# EAGLE board PRESELECTOR REV A (EAGLE 7.7.0), part 1 of 2
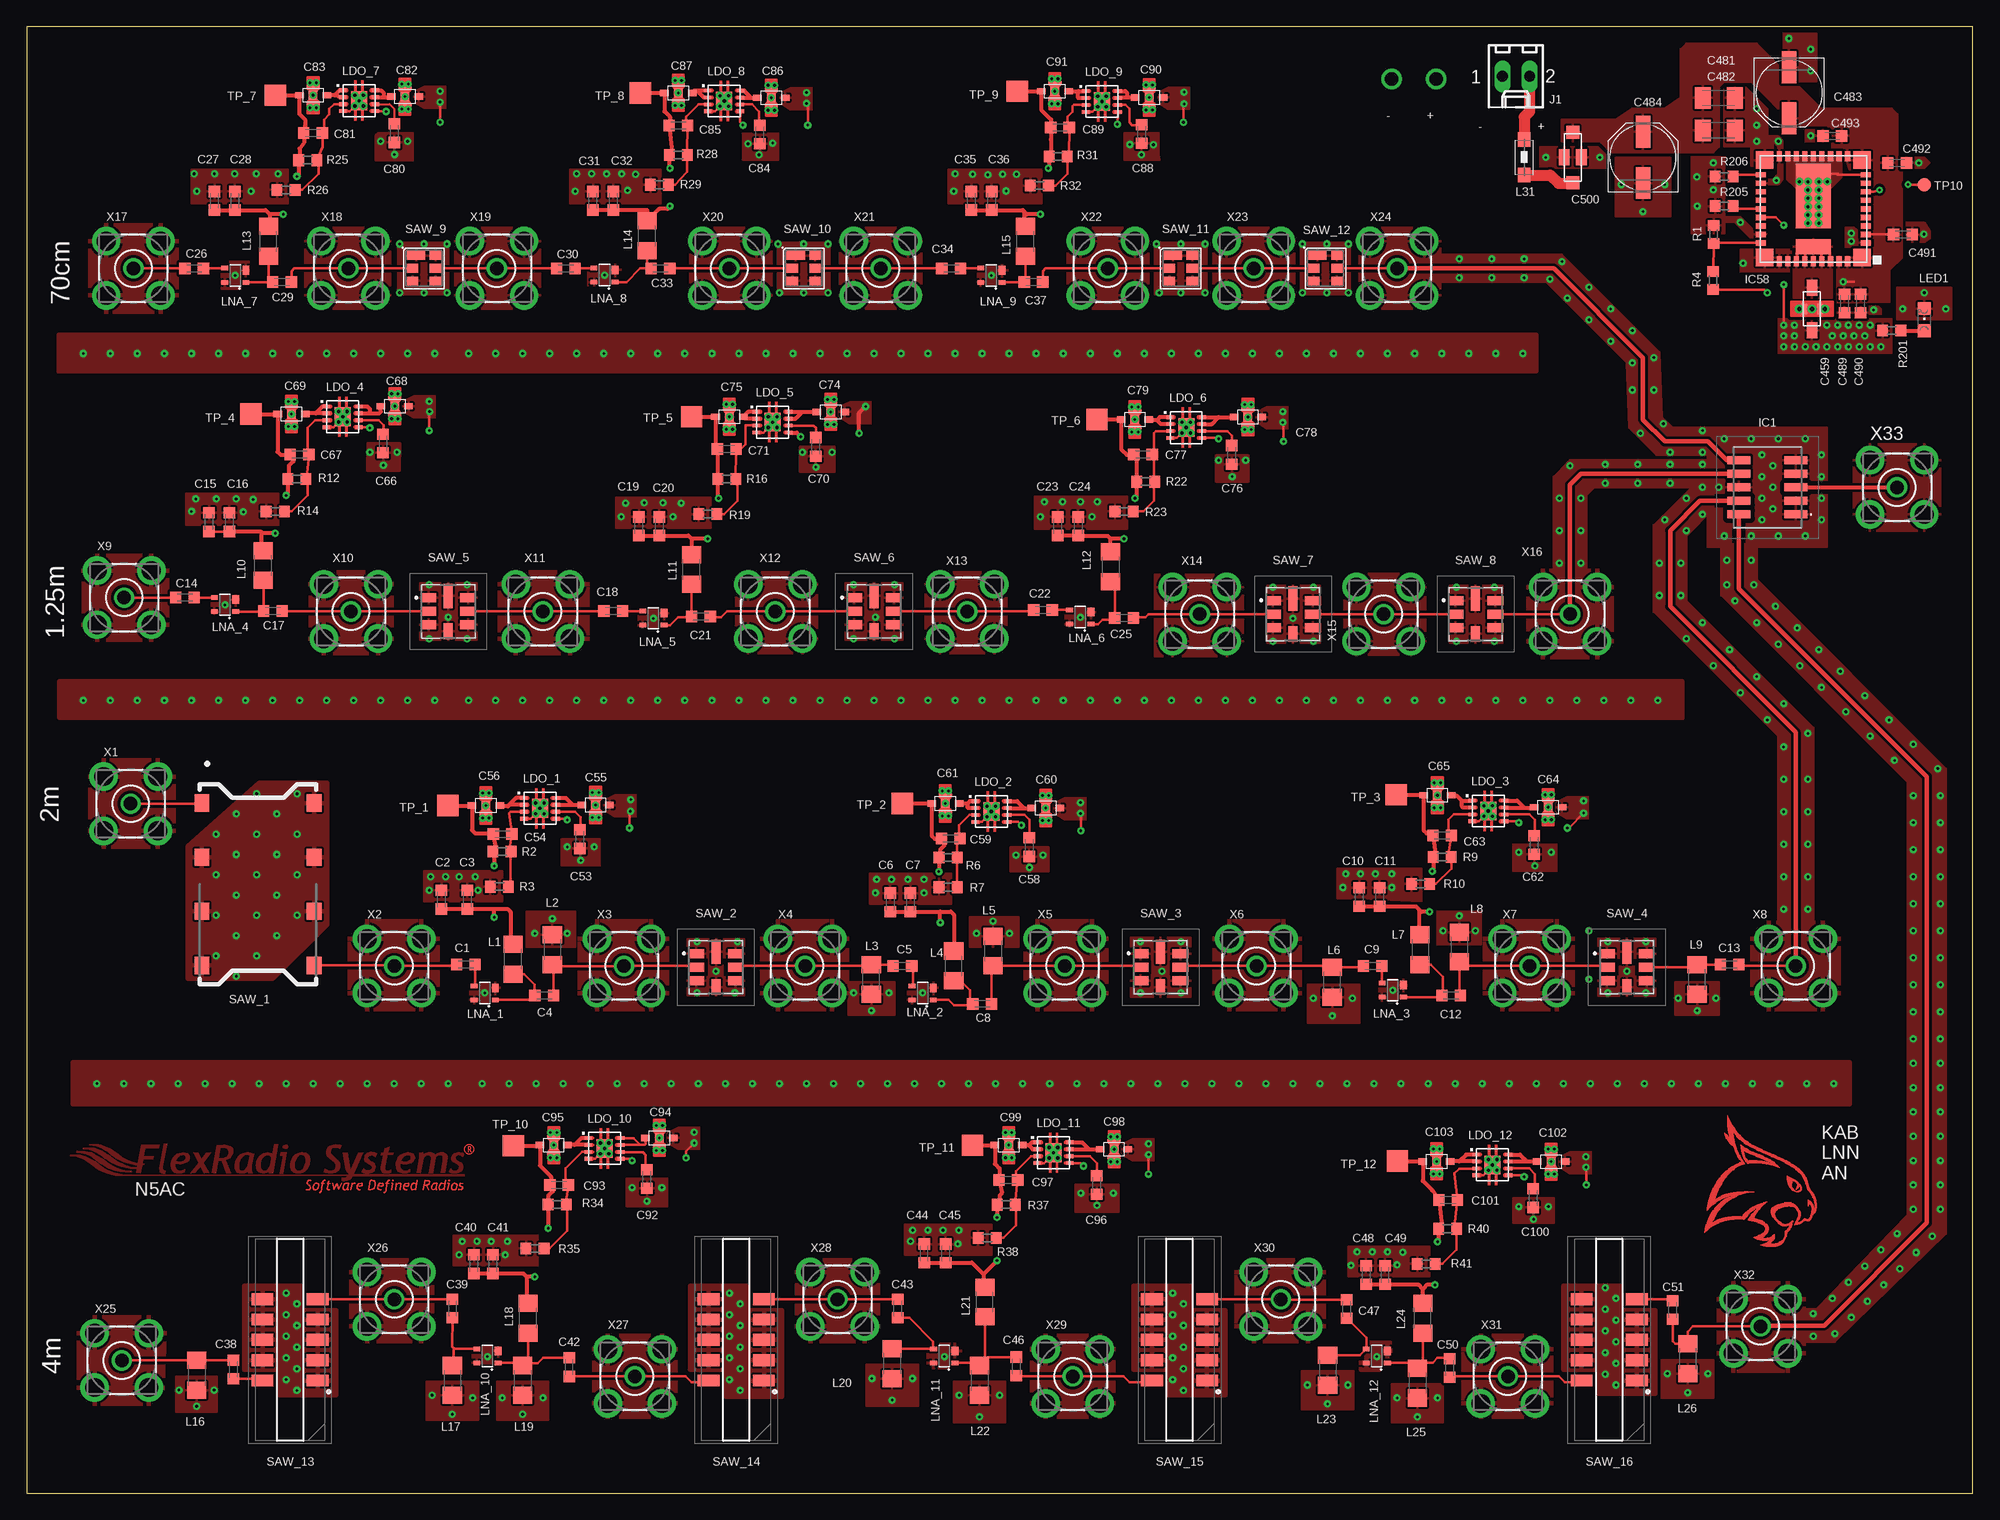
[diagram p0: board, top side]
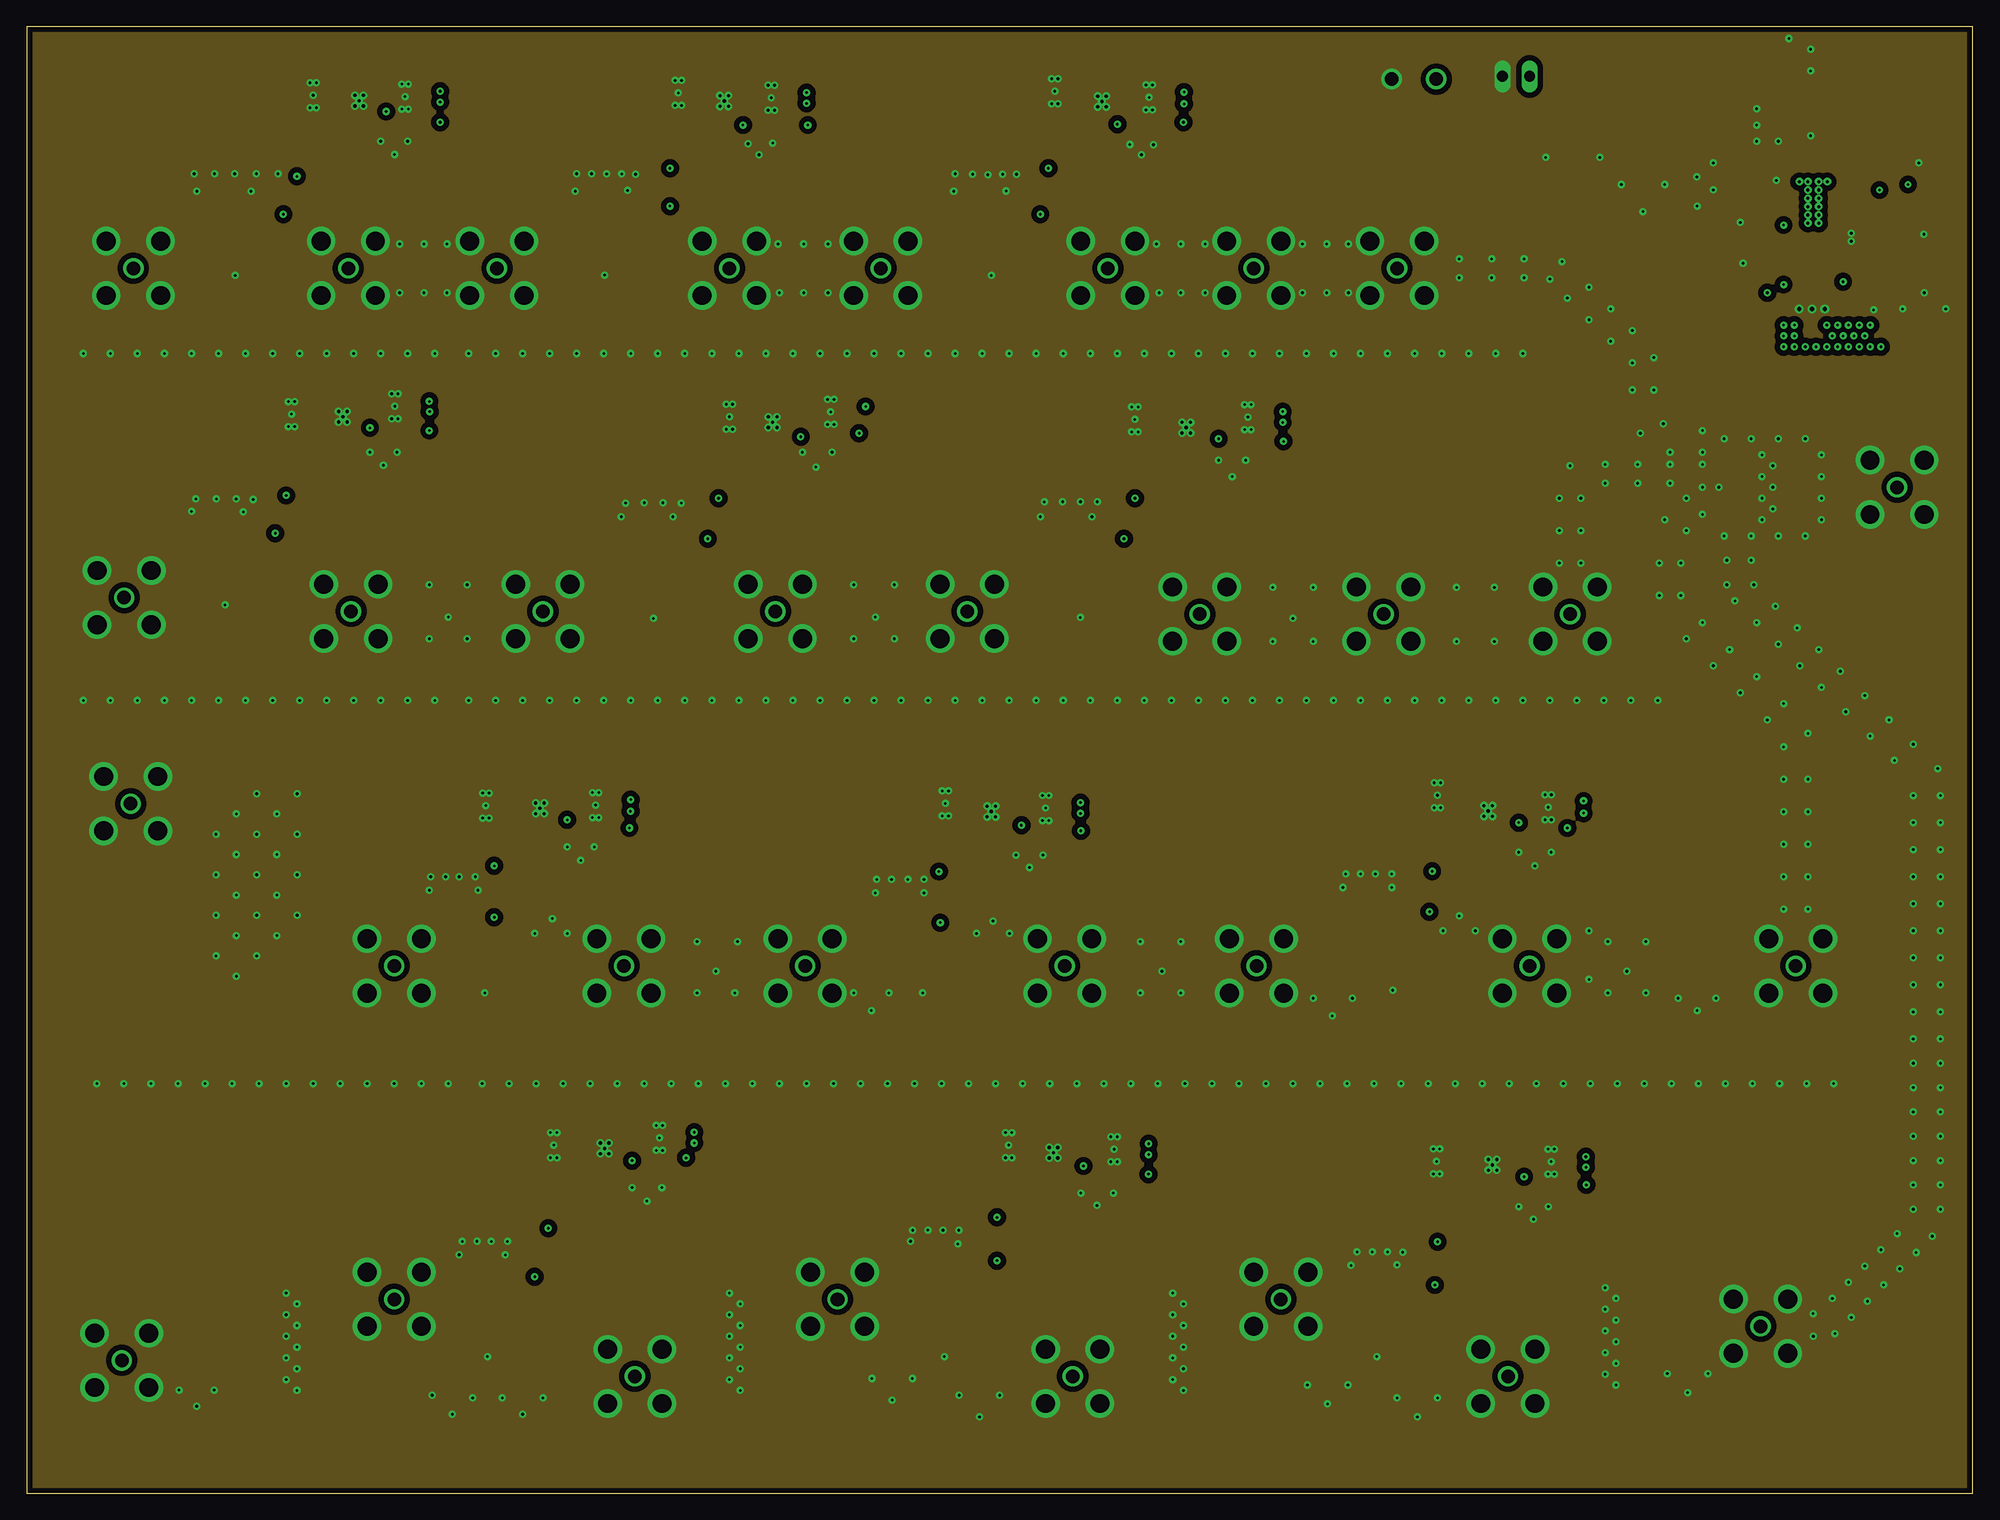
[diagram p1: board, inner layer GND]
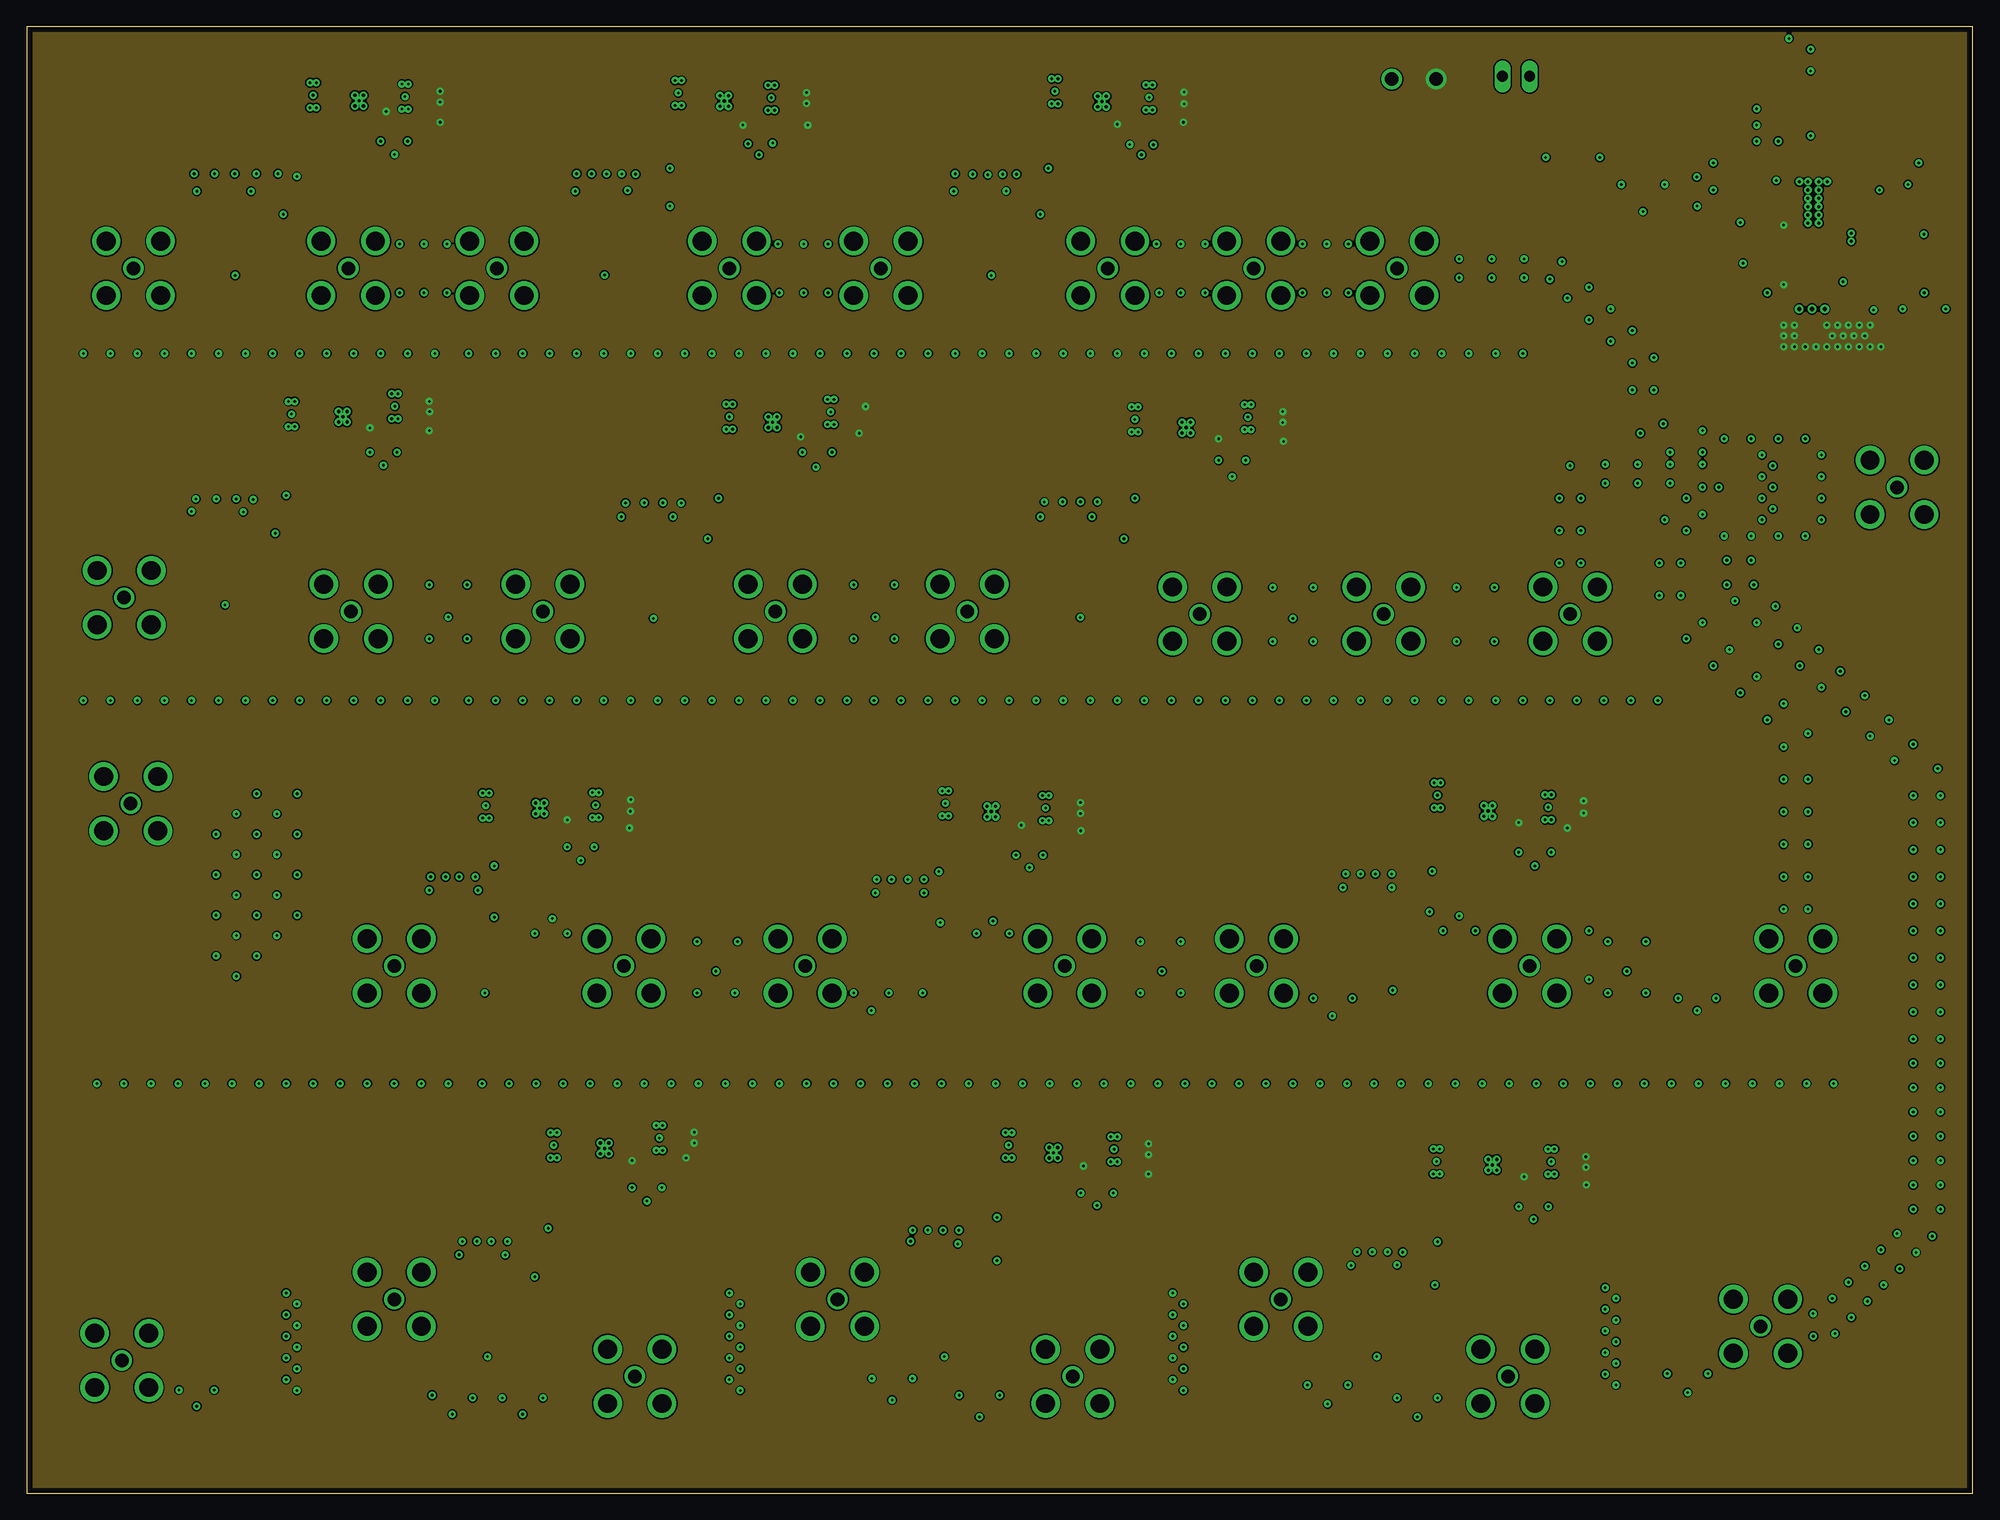
[diagram p2: board, inner layer PWR]
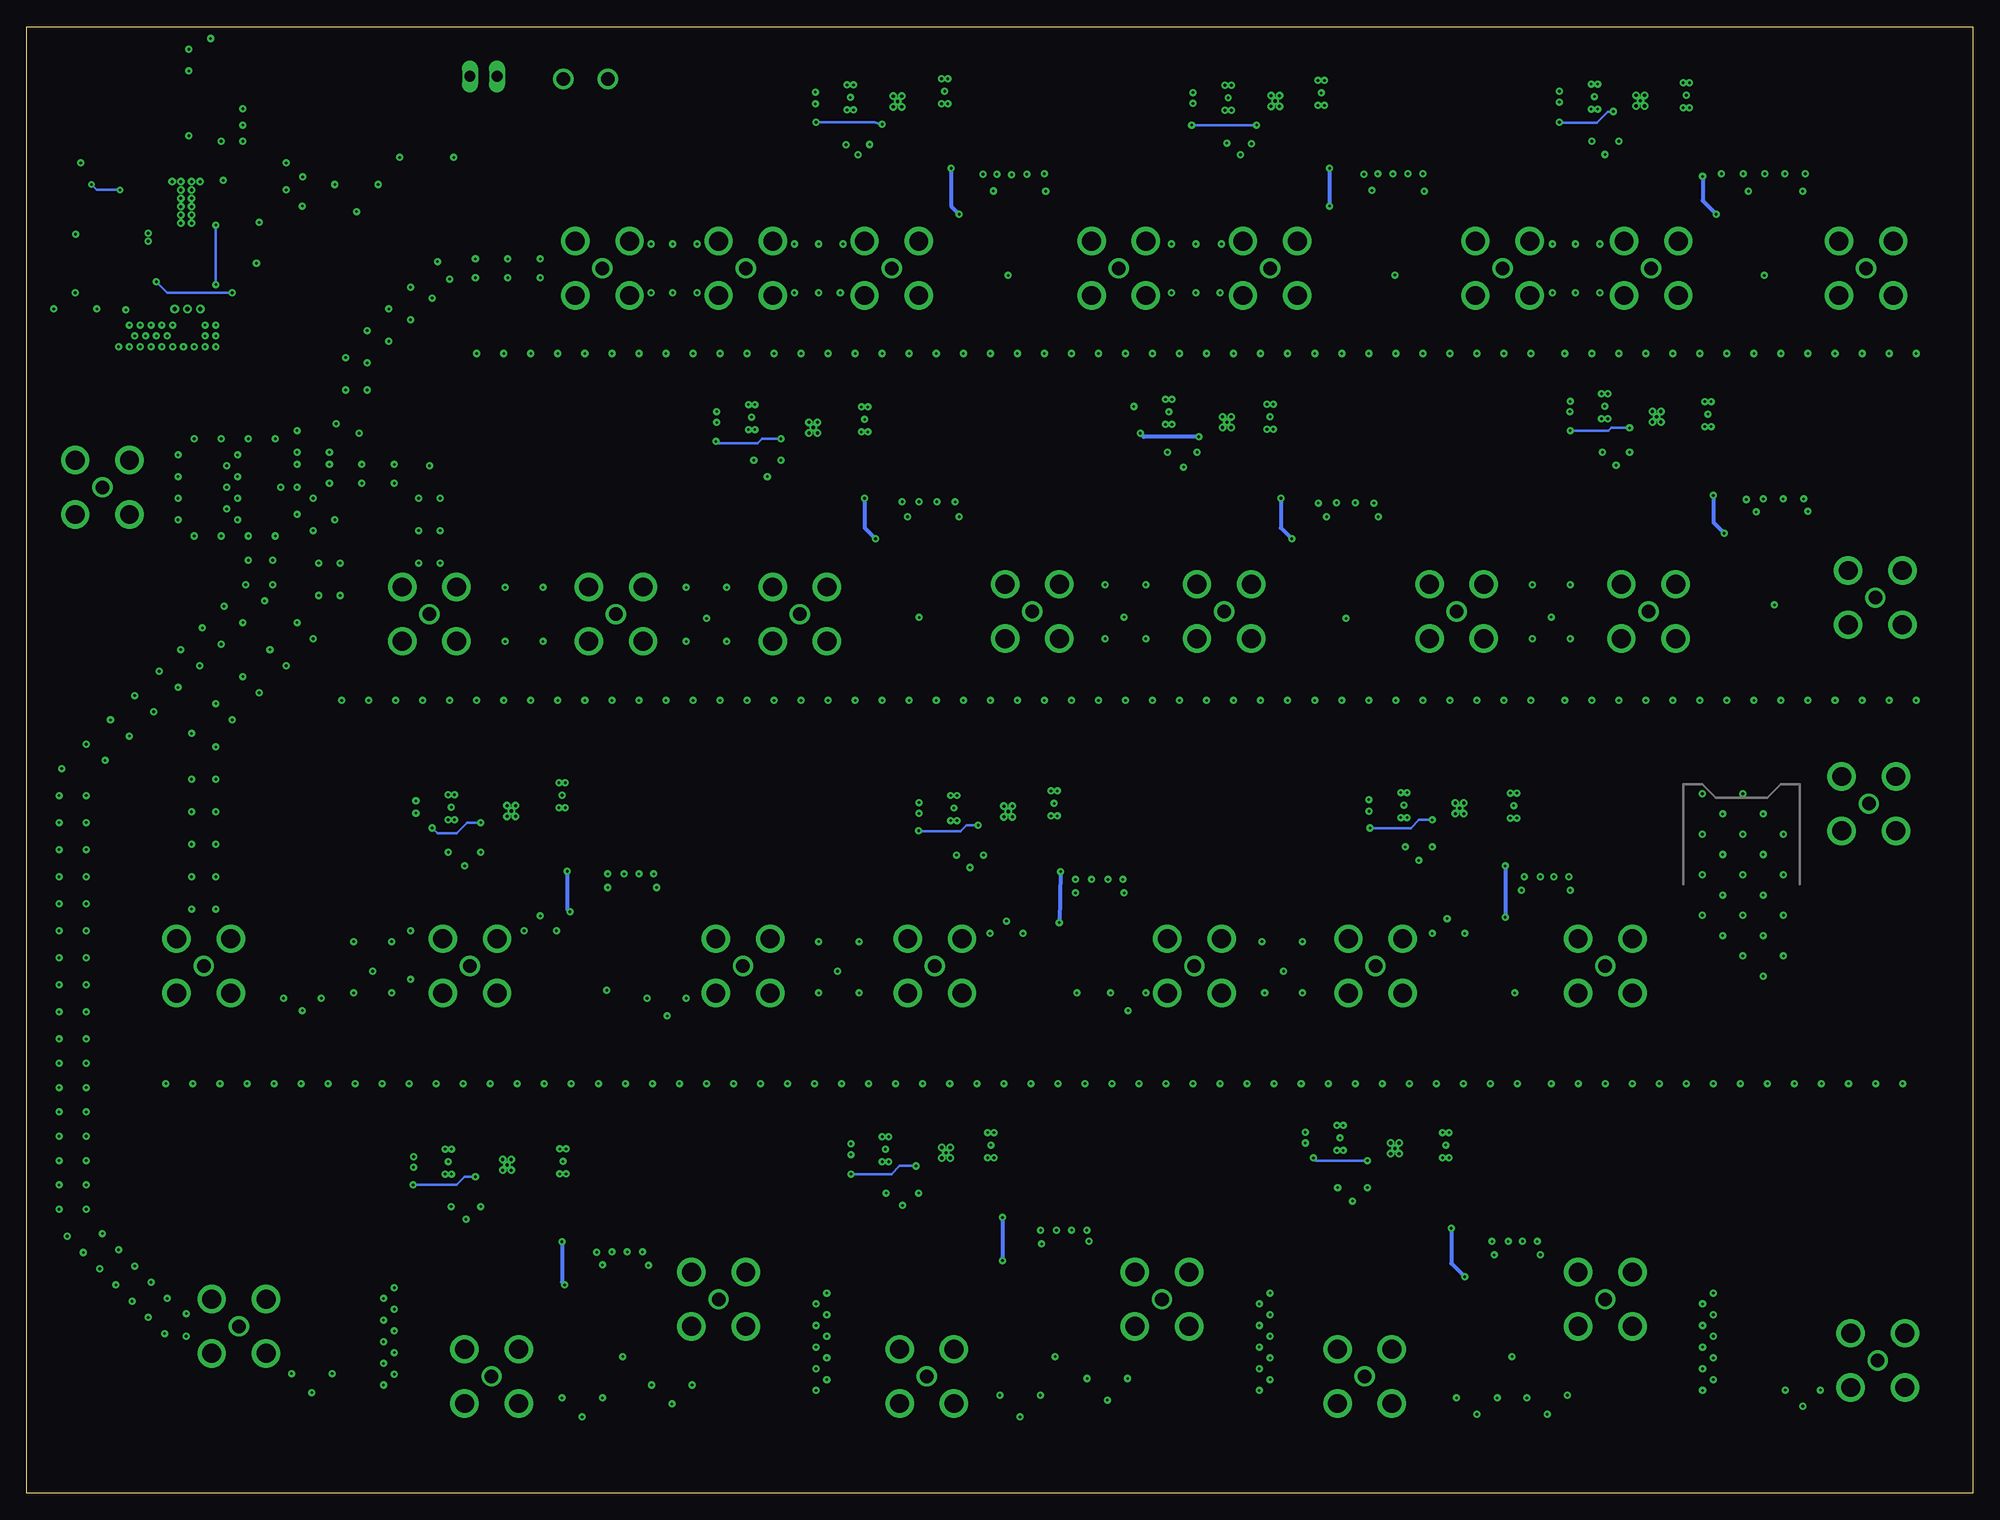
[diagram p3: board, bottom side, seen from below]

Size 182.89 x 137.77 mm. Coordinates in mm from the lower left corner, seen from the top.
Outline: 0,0 182.88,0 182.88,137.77 0,137.77 0,0
Copper layers (1*2+15*16): Top 0.035mm / dielectric 0.15mm / GND 0.035mm / dielectric 0.15mm / PWR 0.035mm / dielectric 0.2mm / Bottom 0.035mm
Design rules "default *": minimum track width 4mil, minimum drill 4mil, track to track 5mil, track to pad 5mil, pad to pad 5mil, via to via 5mil, smd to smd 5mil, copper to edge 20mil, drill to drill 8mil, minimum pad ring 8mil, minimum via ring 8mil, stop-mask expansion 4mil, vias tented up to drill 0mil, thermal gap 8mil
Net classes: 0 default: width 0.102 mm, drill 0.203 mm, clearance 0.102 mm; 1 GND: width 0.203 mm, drill 0.229 mm, clearance 0.203 mm to class 0, clearance 0.203 mm

## Footprints (pad centres in the part's own frame; a part is rotated, then mirrored left to right if it is on the bottom)
C0603K = smd 1.05 x 1.08: 1 -0.875,0; 2 0.875,0
NFM21PS = smd 0.8 x 0.85: GND1 0,0 | smd 1.2 x 0.3: GND2 0,-0.775; GND3 0,0.775 | drill 0.25: GND4 0,0; GND5 -0.3,-1.175; GND6 0.3,-1.175; GND7 0.3,1.175; GND8 -0.3,1.175 | smd 0.8 x 0.6: IN -1.3,0; OUT 1.3,0
NFM31PC276 = smd 1 x 0.5: GND1 0,0.75; GND2 0,-0.75 | drill 0.4: GND3 0,0; GND4 0,1.2; GND5 0,-1.2 | smd 1.5 x 1: IN -2,0; OUT 2,0
C1206K = smd 1.5 x 2: 1 -1.5,0; 2 1.5,0
PANASONIC_D = smd 3 x 1.4: + 2.4,0; - -2.4,0
NFM1806 = smd 1.25 x 1.2: 1 -2.375,0; 2 2.375,0 | smd 1.5 x 1: GND@1 0,-0.8; GND@2 0,0.8
SCA-4-10+ = smd 0.76 x 2.16: 1 -2.54,-2.68; 2 -1.27,-2.68; 3 0,-2.68; 4 1.27,-2.68; 5 2.54,-2.68; 6 2.54,2.68; 7 1.27,2.68; 8 0,2.68; 9 -1.27,2.68; 10 -2.54,2.68
RVQ = smd 1.65 x 1.65: 1 -4.575,-4.575; 11 4.575,-4.575; 21 4.575,4.575; 31 -4.575,4.575 | smd 0.5 x 0.95: 2 -3.2,-4.925; 3 -2.4,-4.925; 4 -1.6,-4.925; 5 -0.8,-4.925; 6 0,-4.925; 7 0.8,-4.925; 8 1.6,-4.925; 9 2.4,-4.925; 10 3.2,-4.925; 22 3.2,4.925; 23 2.4,4.925; 24 1.6,4.925; 25 0.8,4.925; 26 0,4.925; 27 -0.8,4.925; 28 -1.6,4.925; 29 -2.4,4.925; 30 -3.2,4.925 | smd 0.95 x 0.5: 12 4.925,-3.2; 13 4.925,-2.4; 14 4.925,-1.6; 15 4.925,-0.8; 16 4.925,0; 17 4.925,0.8; 18 4.925,1.6; 19 4.925,2.4; 20 4.925,3.2; 32 -4.925,3.2; 33 -4.925,2.4; 34 -4.925,1.6; 35 -4.925,0.8; 36 -4.925,0; 37 -4.925,-0.8; 38 -4.925,-1.6; 39 -4.925,-2.4; 40 -4.925,-3.2 | smd 1.4 x 3.29: 41 -3.55,0 | smd 6.05 x 3.29: 42 1.225,0 | drill 0.3 pad 0.61: 42A -1.35,-0.51; 42B -1.35,0.51; 42C -0.57,-0.51; 42D -0.57,0.51; 42E 0.21,-0.51; 42F 0.21,0.51; 42G 0.99,-0.51; 42H 0.99,0.51; 42J 1.77,-0.51; 42K 1.77,0.51; 42L 2.55,-0.51; 42M 2.55,0.51; 42N 2.55,-1.31; 42P 2.55,1.31
6410-02 = drill 1.016 long: 1 1.27,0; 2 -1.27,0
C1206 = smd 1.6 x 1.8: 1 -1.4,0; 2 1.4,0
1206 = smd 1.35 x 1.2: 1 -1.7,0; 2 1.65,0
DRB = smd 0.35 x 0.65: 1 -0.975,-1.55; 2 -0.325,-1.55; 3 0.325,-1.55; 4 0.975,-1.55; 5 0.975,1.55; 6 0.325,1.55; 7 -0.325,1.55; 8 -0.975,1.55 | drill 0.3 pad 0.406: P1 -0.5,0.4; P2 0.5,0.4; P3 0,0; P4 -0.5,-0.4; P5 0.5,-0.4 | smd 1.75 x 1.5: PAD 0,0
CHIPLED_0805 = smd 1.2 x 1.2: A 0,-1.05; C 0,1.05
SPF-5043Z = smd 0.425 x 0.64: 1 -0.65,-0.995; 3 0.67,1; 4 -0.65,1 | smd 0.8 x 0.64: 2 0.48,-0.995
R0603 = smd 1 x 1.1: 1 -0.85,0; 2 0.85,0
SXBP-140+ = smd 1.626 x 1.397: 1 -7.62,-5.397; 2 -7.62,5.144; 3 -2.54,-5.397; 4 -2.54,5.144; 5 2.54,-5.397; 6 2.54,5.144; 7 7.62,-5.397; 8 7.62,5.144
TA147FD = smd 1.47 x 0.84: 1 -1.865,1.27; 2 -1.865,0; 3 -1.865,-1.27; 5 1.865,-1.27; 6 1.865,0; 7 1.865,1.27 | smd 0.84 x 1.47: 4 0,-1.865 | smd 0.84 x 2.28: 8 0,1.46
TA0576A = smd 1.47 x 0.84: 1 -1.865,1.27; 2 -1.865,0; 3 -1.865,-1.27; 5 1.865,-1.27; 6 1.865,0; 7 1.865,1.27 | smd 0.84 x 1.47: 4 0,-1.865 | smd 0.84 x 2.28: 8 0,1.46
TA1914A = smd 1.7 x 0.81: 1 -0.75,1.195 | smd 1.05 x 0.81: 2 -1.075,0.005; 3 -1.075,-1.185; 4 1.075,-1.185; 5 1.075,0.005; 6 1.075,1.195
S511214 = smd 2.05 x 1.1: 1 -2.6,3.82; 2 -2.6,1.91; 3 -2.6,0; 4 -2.6,-1.91; 5 -2.6,-3.82; 6 2.6,-3.82; 7 2.6,-1.91; 8 2.6,0; 9 2.6,1.91; 10 2.6,3.82
B1,27 = smd 1.27 x 1.27: TP 0,0
TP20SQ = smd 2 x 2: TP 0,0
BU-SMA-V = drill 1.27: 1 0,0 | drill 1.778: 2 -2.55,2.55; 3 2.55,2.55; 4 2.55,-2.55; 5 -2.55,-2.55

## Placement (x,y rotation side)
C1  100p  [C0603K]  41.27,49.66 0 top
C2  0.1u  [C0603K]  38.99,55.75 90 top
C3  100p  [C0603K]  41.4,55.75 90 top
C4  8p  [C0603K]  48.64,46.74 0 top
C5  12p  [C0603K]  82.3,49.53 0 top
C6  0.1u  [C0603K]  81.15,55.5 90 top
C7  100p  [C0603K]  83.06,55.5 90 top
C8  8p  [C0603K]  89.79,45.97 180 top
C9  12p  [C0603K]  126.49,49.53 0 top
C10  0.1u  [C0603K]  125.22,56.01 90 top
C11  100p  [C0603K]  127.13,56.01 90 top
C12  8p  [C0603K]  133.86,46.74 0 top
C13  12p  [C0603K]  160.02,49.66 0 top
C14  100p  [C0603K]  14.88,84.12 0 top
C15  0.1u  [C0603K]  17.14,91.21 90 top
C16  100p  [C0603K]  19.05,91.21 90 top
C17  100p  [C0603K]  23.14,82.85 0 top
C18  100p  [C0603K]  55.12,82.85 0 top
C19  0.1u  [C0603K]  57.53,90.83 90 top
C20  100p  [C0603K]  59.44,90.83 90 top
C21  100p  [C0603K]  63.37,82.35 0 top
C22  100p  [C0603K]  95.5,82.96 0 top
C23  0.1u  [C0603K]  96.9,90.83 90 top
C24  100p  [C0603K]  98.81,90.83 90 top
C25  100p  [C0603K]  103.12,82.19 0 top
C26  100p  [C0603K]  15.75,115.06 0 top
C27  0.1u  [C0603K]  17.65,121.41 90 top
C28  100p  [C0603K]  19.56,121.41 90 top
C29  100p  [C0603K]  24,113.79 0 top
C30  100p  [C0603K]  50.67,115.06 0 top
C31  0.1u  [C0603K]  53.21,121.41 90 top
C32  100p  [C0603K]  55.12,121.41 90 top
C33  100p  [C0603K]  59.56,115.06 0 top
C34  100p  [C0603K]  86.87,115.06 0 top
C35  0.1u  [C0603K]  88.77,121.41 90 top
C36  100p  [C0603K]  90.68,121.41 90 top
C37  100p  [C0603K]  94.61,113.79 0 top
C38  160p  [C0603K]  19.43,11.61 270 top
C39  180p  [C0603K]  40.03,17.35 270 top
C40  0.1u  [C0603K]  42.04,21.51 90 top
C41  100p  [C0603K]  43.81,21.51 90 top
C42  160p  [C0603K]  50.98,11.84 270 top
C43  180p  [C0603K]  81.86,17.35 270 top
C44  0.1u  [C0603K]  84.33,22.53 90 top
C45  100p  [C0603K]  86.36,22.53 90 top
C46  160p  [C0603K]  92.99,11.91 270 top
C47  180p  [C0603K]  124.05,17.3 270 top
C48  0.1u  [C0603K]  125.86,20.5 90 top
C49  100p  [C0603K]  127.64,20.5 90 top
C50  160p  [C0603K]  133.73,11.76 270 top
C51  180p  [C0603K]  154.69,17.2 270 top
C53  470n  [C0603K]  51.99,61.44 270 top
C54  470n  [C0603K]  44.73,61.9 180 top
C55  NFM21PS106B0J3D  [NFM21PS]  53.47,64.64 180 top
C56  NFM21PS106B0J3D  [NFM21PS]  43.15,64.59 180 top
C58  470n  [C0603K]  94.21,60.68 270 top
C59  470n  [C0603K]  86.84,61.49 180 top
C60  NFM21PS106B0J3D  [NFM21PS]  95.76,64.36 180 top
C61  NFM21PS106B0J3D  [NFM21PS]  86.33,64.8 180 top
C62  470n  [C0603K]  141.66,60.88 270 top
C63  470n  [C0603K]  133.02,61.8 180 top
C64  NFM21PS106B0J3D  [NFM21PS]  142.98,64.44 180 top
C65  NFM21PS106B0J3D  [NFM21PS]  132.56,65.56 180 top
C66  470n  [C0603K]  33.5,98.6 270 top
C67  470n  [C0603K]  25.65,97.56 180 top
C68  NFM21PS106B0J3D  [NFM21PS]  34.59,102.11 180 top
C69  NFM21PS106B0J3D  [NFM21PS]  24.89,101.37 180 top
C70  470n  [C0603K]  74.14,98.3 270 top
C71  470n  [C0603K]  65.79,98.07 180 top
C74  NFM21PS106B0J3D  [NFM21PS]  75.56,101.57 180 top
C75  NFM21PS106B0J3D  [NFM21PS]  66.04,101.12 180 top
C76  470n  [C0603K]  113.26,97.54 270 top
C77  470n  [C0603K]  104.9,97.56 180 top
C78  NFM21PS106B0J3D  [NFM21PS]  114.76,101.09 180 top
C79  NFM21PS106B0J3D  [NFM21PS]  104.14,100.86 180 top
C80  470n  [C0603K]  34.54,127.76 270 top
C81  470n  [C0603K]  26.92,127.76 180 top
C82  NFM21PS106B0J3D  [NFM21PS]  35.56,131.19 180 top
C83  NFM21PS106B0J3D  [NFM21PS]  26.92,131.32 180 top
C84  470n  [C0603K]  68.91,127.64 270 top
C85  470n  [C0603K]  61.24,128.5 180 top
C86  NFM21PS106B0J3D  [NFM21PS]  69.98,131.09 180 top
C87  NFM21PS106B0J3D  [NFM21PS]  61.24,131.55 180 top
C88  470n  [C0603K]  104.78,127.69 270 top
C89  470n  [C0603K]  97.1,128.3 180 top
C90  NFM21PS106B0J3D  [NFM21PS]  105.49,131.11 180 top
C91  NFM21PS106B0J3D  [NFM21PS]  96.62,131.7 180 top
C92  470n  [C0603K]  58.29,29.51 270 top
C93  470n  [C0603K]  50.04,28.96 180 top
C94  NFM21PS106B0J3D  [NFM21PS]  59.46,33.38 180 top
C95  NFM21PS106B0J3D  [NFM21PS]  49.53,32.69 180 top
C96  470n  [C0603K]  100.56,28.96 270 top
C97  470n  [C0603K]  92.25,29.44 180 top
C98  NFM21PS106B0J3D  [NFM21PS]  102.18,32.31 180 top
C99  NFM21PS106B0J3D  [NFM21PS]  92.28,32.69 180 top
C100  470n  [C0603K]  141.58,27.71 270 top
C101  470n  [C0603K]  133.58,27.56 180 top
C102  NFM21PS106B0J3D  [NFM21PS]  143.26,31.14 180 top
C103  NFM21PS106B0J3D  [NFM21PS]  132.49,31.17 180 top
C459  [NFM31PC276]  167.77,111.25 270 top
C481  33u  [C1206K]  159,131.06 0 top
C482  33u  [C1206K]  159,128.02 0 top
C483  EEE-FK1V470P  [PANASONIC_D]  165.61,131.57 270 top
C484  EEE-FK1V470P  [PANASONIC_D]  151.89,125.48 90 top
C489  .1u 50V  [C0603K]  170.81,111.76 270 top
C490  .1u 50V  [C0603K]  172.34,111.76 270 top
C491  .1u 50V  [C0603K]  176.3,118.24 0 top
C492  .1u 50V  [C0603K]  175.77,124.97 0 top
C493  .1u 50V  [C0603K]  169.67,127.51 180 top
C500  NFM41PC155B1E3  [NFM1806]  145.29,125.48 90 top
IC1  SCA-4-10+  [SCA-4-10+]  163.58,94.49 90 top
IC58  LMZ31707RVQ  [RVQ]  167.89,120.65 90 top
J1  22-27-2021-02  [6410-02]  139.95,133.1 180 top
L1  100n  [C1206]  45.72,50.16 90 top
L2  56n  [C1206]  49.4,51.05 270 top
L3  47n  [C1206]  79.38,48.26 90 top
L4  100n  [C1206]  87.12,49.53 90 top
L5  56n  [C1206]  90.81,50.93 270 top
L6  47n  [C1206]  122.68,48.01 90 top
L7  100n  [C1206]  130.94,51.05 270 top
L8  56n  [C1206]  134.62,51.31 270 top
L9  47n  [C1206]  156.97,48.26 90 top
L10  100n  [C1206]  22.23,87.15 90 top
L11  100n  [C1206]  62.48,86.77 90 top
L12  100n  [C1206]  101.85,87.02 270 top
L13  100n  [C1206]  22.73,117.6 90 top
L14  100n  [C1206]  58.29,118.11 90 top
L15  100n  [C1206]  93.85,117.6 90 top
L16  100n  [C1206]  15.98,11.07 270 top
L17  100n  [C1206]  40.01,10.59 270 top
L18  100n  [C1206]  47.12,16.43 90 top
L19  100n  [C1206]  46.61,10.59 270 top
L20  100n  [C1206]  81.33,12.17 270 top
L21  100n  [C1206]  90.04,17.96 90 top
L22  100n  [C1206]  89.53,10.59 270 top
L23  100n  [C1206]  122.25,11.56 270 top
L24  100n  [C1206]  131.19,16.43 90 top
L25  100n  [C1206]  130.68,10.34 270 top
L26  100n  [C1206]  156.08,12.62 270 top
L31  BLM31PG121SN1L  [1206]  140.72,125.48 270 top
LDO_1  TPS7A8101DRB  [DRB]  48.23,64.34 270 top
LDO_2  TPS7A8101DRB  [DRB]  90.65,64.03 270 top
LDO_3  TPS7A8101DRB  [DRB]  137.34,64.08 270 top
LDO_4  TPS7A8101DRB  [DRB]  29.72,101.12 270 top
LDO_5  TPS7A8101DRB  [DRB]  70.1,100.61 270 top
LDO_6  TPS7A8101DRB  [DRB]  108.97,100.1 270 top
LDO_7  TPS7A8101DRB  [DRB]  31.24,130.81 270 top
LDO_8  TPS7A8101DRB  [DRB]  65.56,130.78 270 top
LDO_9  TPS7A8101DRB  [DRB]  101.04,130.73 270 top
LDO_10  TPS7A8101DRB  [DRB]  54.31,32.38 270 top
LDO_11  TPS7A8101DRB  [DRB]  96.49,31.98 270 top
LDO_12  TPS7A8101DRB  [DRB]  137.74,30.84 270 top
LED1  LTST-C170GKT  [CHIPLED_0805]  178.31,110.24 0 top
LNA_1  SPF-5043Z  [SPF-5043Z]  43.05,46.99 90 top
LNA_2  SPF-5043Z  [SPF-5043Z]  84.2,46.99 90 top
LNA_3  SPF-5043Z  [SPF-5043Z]  128.37,47.24 90 top
LNA_4  SPF-5043Z  [SPF-5043Z]  18.64,83.46 90 top
LNA_5  SPF-5043Z  [SPF-5043Z]  58.9,82.19 90 top
LNA_6  SPF-5043Z  [SPF-5043Z]  99.01,82.3 90 top
LNA_7  SPF-5043Z  [SPF-5043Z]  19.61,114.4 90 top
LNA_8  SPF-5043Z  [SPF-5043Z]  54.31,114.43 90 top
LNA_9  SPF-5043Z  [SPF-5043Z]  90.65,114.4 90 top
LNA_10  SPF-5043Z  [SPF-5043Z]  43.31,12.88 90 top
LNA_11  SPF-5043Z  [SPF-5043Z]  86.23,12.88 90 top
LNA_12  SPF-5043Z  [SPF-5043Z]  126.87,12.88 90 top
R1  14k  [R0603]  158.52,118.24 90 top
R2  52.3k  [R0603]  44.68,60.27 0 top
R3  10.0k  [R0603]  44.42,56.97 180 top
R4  68.1k  [R0603]  158.47,113.92 90 top
R6  52.3k  [R0603]  86.59,59.72 0 top
R7  10.0k  [R0603]  86.59,56.92 180 top
R9  52.3k  [R0603]  133.02,59.77 0 top
R10  10.0k  [R0603]  130.99,57.23 180 top
R12  52.3k  [R0603]  25.4,95.28 0 top
R14  10.0k  [R0603]  23.37,92.23 180 top
R16  52.3k  [R0603]  65.79,95.28 0 top
R19  10.0k  [R0603]  64.01,91.97 180 top
R22  52.3k  [R0603]  105.16,95.02 0 top
R23  10.0k  [R0603]  103.12,92.23 180 top
R25  52.3k  [R0603]  26.42,125.22 0 top
R26  10.0k  [R0603]  24.38,122.43 180 top
R28  52.3k  [R0603]  61.24,125.7 0 top
R29  10.0k  [R0603]  59.46,122.91 180 top
R31  52.3k  [R0603]  96.93,125.58 0 top
R32  10.0k  [R0603]  95.17,122.83 180 top
R34  52.3k  [R0603]  49.86,27.13 0 top
R35  10.0k  [R0603]  47.78,22.99 180 top
R37  52.3k  [R0603]  92.05,27.1 0 top
R38  10.0k  [R0603]  90.27,23.98 180 top
R40  52.3k  [R0603]  133.53,24.84 0 top
R41  10.0k  [R0603]  131.52,21.54 180 top
R201  560  [R0603]  175.26,109.22 180 top
R205  182  [R0603]  159.51,120.9 0 top
R206  53.6k  [R0603]  159.51,123.7 0 top
SAW_1  SXBP-140+  [SXBP-140+]  21.87,57.2 270 top
SAW_2  TA147FD  [TA147FD]  64.77,49.4 0 top
SAW_3  TA147FD  [TA147FD]  106.55,49.4 0 top
SAW_4  TA147FD  [TA147FD]  150.37,49.4 0 top
SAW_5  TA0576A  [TA0576A]  39.62,82.83 0 top
SAW_6  TA0576A  [TA0576A]  79.63,82.83 0 top
SAW_7  TA0576A  [TA0576A]  119,82.58 0 top
SAW_8  TA0576A  [TA0576A]  136.14,82.58 0 top
SAW_9  TA1914A  [TA1914A]  37.34,115.06 0 top
SAW_10  TA1914A  [TA1914A]  73.03,115.06 0 top
SAW_11  TA1914A  [TA1914A]  108.46,115.06 0 top
SAW_12  TA1914A  [TA1914A]  122.05,115.06 0 top
SAW_13  S511214  [S511214]  24.77,14.4 180 top
SAW_14  S511214  [S511214]  66.67,14.4 180 top
SAW_15  S511214  [S511214]  108.33,14.4 180 top
SAW_16  S511214  [S511214]  148.72,14.4 180 top
TP10  TPSQB1,27  [B1,27]  178.31,122.94 0 top
TP_1  TPTP20SQ  [TP20SQ]  39.6,64.59 270 top
TP_2  TPTP20SQ  [TP20SQ]  82.27,64.8 270 top
TP_3  TPTP20SQ  [TP20SQ]  128.7,65.61 270 top
TP_4  TPTP20SQ  [TP20SQ]  21.08,101.37 270 top
TP_5  TPTP20SQ  [TP20SQ]  62.48,101.12 270 top
TP_6  TPTP20SQ  [TP20SQ]  100.58,100.86 270 top
TP_7  TPTP20SQ  [TP20SQ]  23.37,131.32 270 top
TP_8  TPTP20SQ  [TP20SQ]  57.68,131.55 270 top
TP_9  TPTP20SQ  [TP20SQ]  93.09,131.7 270 top
TP_10  TPTP20SQ  [TP20SQ]  45.75,32.64 270 top
TP_11  TPTP20SQ  [TP20SQ]  88.87,32.69 270 top
TP_12  TPTP20SQ  [TP20SQ]  128.8,31.19 270 top
X1  0733660061  [BU-SMA-V]  9.78,64.77 0 top
X2  0733660061  [BU-SMA-V]  34.54,49.53 0 top
X3  0733660061  [BU-SMA-V]  56.13,49.53 0 top
X4  0733660061  [BU-SMA-V]  73.15,49.53 0 top
X5  0733660061  [BU-SMA-V]  97.54,49.53 0 top
X6  0733660061  [BU-SMA-V]  115.57,49.53 0 top
X7  0733660061  [BU-SMA-V]  141.22,49.53 0 top
X8  0733660061  [BU-SMA-V]  166.24,49.53 0 top
X9  0733660061  [BU-SMA-V]  9.17,84.12 0 top
X10  0733660061  [BU-SMA-V]  30.48,82.83 90 top
X11  0733660061  [BU-SMA-V]  48.51,82.83 90 top
X12  0733660061  [BU-SMA-V]  70.36,82.83 90 top
X13  0733660061  [BU-SMA-V]  88.39,82.83 90 top
X14  0733660061  [BU-SMA-V]  110.24,82.58 90 top
X15  0733660061  [BU-SMA-V]  127.51,82.58 90 top
X16  0733660061  [BU-SMA-V]  145.03,82.58 0 top
X17  0733660061  [BU-SMA-V]  10.03,115.06 0 top
X18  0733660061  [BU-SMA-V]  30.23,115.06 0 top
X19  0733660061  [BU-SMA-V]  44.2,115.06 0 top
X20  0733660061  [BU-SMA-V]  66.04,115.06 0 top
X21  0733660061  [BU-SMA-V]  80.26,115.06 0 top
X22  0733660061  [BU-SMA-V]  101.6,115.06 0 top
X23  0733660061  [BU-SMA-V]  115.32,115.06 0 top
X24  0733660061  [BU-SMA-V]  128.78,115.06 0 top
X25  0733660061  [BU-SMA-V]  8.94,12.47 0 top
X26  0733660061  [BU-SMA-V]  34.54,18.21 0 top
X27  0733660061  [BU-SMA-V]  57.15,10.97 0 top
X28  0733660061  [BU-SMA-V]  76.2,18.21 0 top
X29  0733660061  [BU-SMA-V]  98.3,10.97 0 top
X30  0733660061  [BU-SMA-V]  117.86,18.21 0 top
X31  0733660061  [BU-SMA-V]  139.19,10.97 0 top
X32  0733660061  [BU-SMA-V]  162.94,15.67 0 top
X33  0733660061  [BU-SMA-V]  175.77,94.49 0 top

## Library data of the parts
C1-C51 C53 C54 C58 C59 C62 C63 C66 C67 C70 C71 C76 C77 C80 C81 C84 C85 C88 C89 C92 C93 C96 C97 C100 C101 C481 C482 C489-C493 R1-R4 R6 R7 R9 R10 R12 R14 R16 R19 R22 R23 R25 R26 R28 R29 R31 R32 R34 R35 R37 R38 R40 R41 R201 R205 R206 = rcl
C55 C56 C60 C61 C64 C65 C68 C69 C74 C75 C78 C79 C82 C83 C86 C87 C90 C91 C94 C95 C98 C99 C102 C103 C459 IC58 LDO_1-LDO_12 = DEEP EDDY
C483 C484 = rcl; PN: EEE-FK1V470P
C500 = NewSDR; CURRENT: 6A; VOLATAGE: 25VDC
IC1 = SeniorDesign; DESCRIPTION: Surface Mount Power Splitter/Combiner; HEIGHT: 4.83mm; MANUFACTURER_NAME: Mini-Circuits; MANUFACTURER_PART_NUMBER: SCA-4-10+
J1 = con-molex; OC_FARNELL: unknown; OC_NEWARK: unknown
L1-L26 = NewSDR
L31 = wuerth-elektronik; INDUCTANCE: 32u
LED1 = led
LNA_1-LNA_12 SAW_1-SAW_4 SAW_9-SAW_12 = SeniorDesign
SAW_5-SAW_8 = SeniorDesign; DESCRIPTION: SAW Filter 221.6 MHz SMD 5.0x5.0mm; HEIGHT: 1.7mm; MANUFACTURER_NAME: TAI-SAW Technology; MANUFACTURER_PART_NUMBER: TA0576A
SAW_13-SAW_16 = SeniorDesign; DESCRIPTION: 70 MHz Bandpass Filter, 1.3 MHz Bandwidth; HEIGHT: 2mm; MANUFACTURER_NAME: Sawtron; MANUFACTURER_PART_NUMBER: S511214
TP10 TP_1-TP_12 = testpad
X1-X33 = con-coax

## Nets
1.25_RF_OUT: IC1.7 SAW_8.6 X16.1
1.25M_RF_IN: C14.1 X9.1
2M_RF_IN: SAW_1.1 X1.1
2M_RF_OUT: C13.2 IC1.9 X8.1
4M_RF_IN: C38.1 L16.1 X25.1
4M_RF_OUT: C51.2 IC1.10 L26.1 X32.1
70CM_RF_IN [GND]: C26.1 X17.1
70CM_RF_OUT: IC1.6 SAW_12.5 X24.1
+5V3: C55.IN C60.IN C64.IN C68.IN C74.IN C78.IN C82.IN C86.IN C90.IN C94.IN C98.IN C102.IN C459.OUT IC58.27 LDO_1.5 LDO_2.5 LDO_3.5 LDO_4.5 LDO_5.5 LDO_6.5 LDO_7.5 LDO_8.5 LDO_9.5 LDO_10.5 LDO_11.5 LDO_12.5 R201.2
+13.8V_SW_FIL: C481.1 C482.1 C483.+ C484.+ C489.1 C490.1 C491.1 C492.1 C493.1 C500.2 IC58.1 IC58.3 IC58.11 IC58.12 IC58.39 IC58.40 R4.1
+13.8V_TPS: J1.2 L31.1
GND [GND]: C2.2 C3.2 C6.2 C7.2 C10.2 C11.2 C15.2 C16.2 C19.2 C20.2 C23.2 C24.2 C27.2 C28.2 C31.2 C32.2 C35.2 C36.2 C40.2 C41.2 C44.2 C45.2 C48.2 C49.2 C53.2 C55.GND1 C55.GND2 C55.GND3 C55.GND4 C55.GND5 C55.GND6 C55.GND7 C55.GND8 C56.GND1 C56.GND2 C56.GND3 C56.GND4 C56.GND5 C56.GND6 C56.GND7 C56.GND8 C58.2 C60.GND1 C60.GND2 C60.GND3 C60.GND4 C60.GND5 C60.GND6 C60.GND7 C60.GND8 C61.GND1 C61.GND2 C61.GND3 C61.GND4 C61.GND5 C61.GND6 C61.GND7 C61.GND8 C62.2 C64.GND1 C64.GND2 C64.GND3 C64.GND4 C64.GND5 C64.GND6 C64.GND7 C64.GND8 C65.GND1 C65.GND2 C65.GND3 C65.GND4 C65.GND5 C65.GND6 C65.GND7 C65.GND8 C66.2 C68.GND1 C68.GND2 C68.GND3 C68.GND4 C68.GND5 C68.GND6 C68.GND7 C68.GND8 C69.GND1 C69.GND2 C69.GND3 C69.GND4 C69.GND5 C69.GND6 C69.GND7 C69.GND8 C70.2 C74.GND1 C74.GND2 C74.GND3 C74.GND4 C74.GND5 C74.GND6 C74.GND7 C74.GND8 C75.GND1 C75.GND2 C75.GND3 C75.GND4 C75.GND5 C75.GND6 C75.GND7 C75.GND8 C76.2 C78.GND1 C78.GND2 C78.GND3 C78.GND4 C78.GND5 C78.GND6 C78.GND7 C78.GND8 C79.GND1 C79.GND2 C79.GND3 C79.GND4 C79.GND5 C79.GND6 C79.GND7 C79.GND8 C80.2 C82.GND1 C82.GND2 C82.GND3 C82.GND4 C82.GND5 C82.GND6 C82.GND7 C82.GND8 C83.GND1 C83.GND2 C83.GND3 C83.GND4 C83.GND5 C83.GND6 C83.GND7 C83.GND8 C84.2 C86.GND1 C86.GND2 C86.GND3 C86.GND4 C86.GND5 C86.GND6 C86.GND7 C86.GND8 C87.GND1 C87.GND2 C87.GND3 C87.GND4 C87.GND5 C87.GND6 C87.GND7 C87.GND8 C88.2 C90.GND1 C90.GND2 C90.GND3 C90.GND4 C90.GND5 C90.GND6 C90.GND7 C90.GND8 C91.GND1 C91.GND2 C91.GND3 C91.GND4 C91.GND5 C91.GND6 C91.GND7 C91.GND8 C92.2 C94.GND1 C94.GND2 C94.GND3 C94.GND4 C94.GND5 C94.GND6 C94.GND7 C94.GND8 C95.GND1 C95.GND2 C95.GND3 C95.GND4 C95.GND5 C95.GND6 C95.GND7 C95.GND8 C96.2 C98.GND1 C98.GND2 C98.GND3 C98.GND4 C98.GND5 C98.GND6 C98.GND7 C98.GND8 C99.GND1 C99.GND2 C99.GND3 C99.GND4 C99.GND5 C99.GND6 C99.GND7 C99.GND8 C100.2 C102.GND1 C102.GND2 C102.GND3 C102.GND4 C102.GND5 C102.GND6 C102.GND7 C102.GND8 C103.GND1 C103.GND2 C103.GND3 C103.GND4 C103.GND5 C103.GND6 C103.GND7 C103.GND8 C459.GND1 C459.GND2 C459.GND3 C459.GND4 C459.GND5 C481.2 C482.2 C483.- C484.- C489.2 C490.2 C491.2 C492.2 C493.2 C500.GND@1 C500.GND@2 IC1.1 IC1.2 IC1.4 IC1.5 IC1.8 IC58.2 IC58.20 IC58.21 IC58.23 IC58.29 IC58.31 IC58.32 IC58.33 J1.1 L2.1 L3.1 L5.1 L6.1 L8.1 L9.1 L16.2 L17.2 L19.2 L20.2 L22.2 L23.2 L25.2 L26.2 LDO_1.4 LDO_1.P1 LDO_1.P2 LDO_1.P3 LDO_1.P4 LDO_1.P5 LDO_1.PAD LDO_2.4 LDO_2.P1 LDO_2.P2 LDO_2.P3 LDO_2.P4 LDO_2.P5 LDO_2.PAD LDO_3.4 LDO_3.P1 LDO_3.P2 LDO_3.P3 LDO_3.P4 LDO_3.P5 LDO_3.PAD LDO_4.4 LDO_4.P1 LDO_4.P2 LDO_4.P3 LDO_4.P4 LDO_4.P5 LDO_4.PAD LDO_5.4 LDO_5.P1 LDO_5.P2 LDO_5.P3 LDO_5.P4 LDO_5.P5 LDO_5.PAD LDO_6.4 LDO_6.P1 LDO_6.P2 LDO_6.P3 LDO_6.P4 LDO_6.P5 LDO_6.PAD LDO_7.4 LDO_7.P1 LDO_7.P2 LDO_7.P3 LDO_7.P4 LDO_7.P5 LDO_7.PAD LDO_8.4 LDO_8.P1 LDO_8.P2 LDO_8.P3 LDO_8.P4 LDO_8.P5 LDO_8.PAD LDO_9.4 LDO_9.P1 LDO_9.P2 LDO_9.P3 LDO_9.P4 LDO_9.P5 LDO_9.PAD LDO_10.4 LDO_10.P1 LDO_10.P2 LDO_10.P3 LDO_10.P4 LDO_10.P5 LDO_10.PAD LDO_11.4 LDO_11.P1 LDO_11.P2 LDO_11.P3 LDO_11.P4 LDO_11.P5 LDO_11.PAD LDO_12.4 LDO_12.P1 LDO_12.P2 LDO_12.P3 LDO_12.P4 LDO_12.P5 LDO_12.PAD LED1.C LNA_1.2 LNA_1.4 LNA_2.2 LNA_2.4 LNA_3.2 LNA_3.4 LNA_4.2 LNA_4.4 LNA_5.2 LNA_5.4 LNA_6.2 LNA_6.4 LNA_7.2 LNA_7.4 LNA_8.2 LNA_8.4 LNA_9.2 LNA_9.4 LNA_10.2 LNA_10.4 LNA_11.2 LNA_11.4 LNA_12.2 LNA_12.4 R1.2 R3.2 R7.2 R10.2 R14.2 R19.2 R23.2 R26.2 R29.2 R32.2 R35.2 R38.2 R41.2 R205.1 R206.1 SAW_1.2 SAW_1.3 SAW_1.4 SAW_1.5 SAW_1.6 SAW_1.7 SAW_2.1 SAW_2.3 SAW_2.4 SAW_2.5 SAW_2.7 SAW_2.8 SAW_3.1 SAW_3.3 SAW_3.4 SAW_3.5 SAW_3.7 SAW_3.8 SAW_4.1 SAW_4.3 SAW_4.4 SAW_4.5 SAW_4.7 SAW_4.8 SAW_5.1 SAW_5.3 SAW_5.4 SAW_5.5 SAW_5.7 SAW_5.8 SAW_6.1 SAW_6.3 SAW_6.4 SAW_6.5 SAW_6.7 SAW_6.8 SAW_7.1 SAW_7.3 SAW_7.4 SAW_7.5 SAW_7.7 SAW_7.8 SAW_8.1 SAW_8.3 SAW_8.4 SAW_8.5 SAW_8.7 SAW_8.8 SAW_9.1 SAW_9.3 SAW_9.4 SAW_9.6 SAW_10.1 SAW_10.3 SAW_10.4 SAW_10.6 SAW_11.1 SAW_11.3 SAW_11.4 SAW_11.6 SAW_12.1 SAW_12.3 SAW_12.4 SAW_12.6 SAW_13.1 SAW_13.2 SAW_13.3 SAW_13.4 SAW_13.6 SAW_13.7 SAW_13.8 SAW_13.9 SAW_14.1 SAW_14.2 SAW_14.3 SAW_14.4 SAW_14.6 SAW_14.7 SAW_14.8 SAW_14.9 SAW_15.1 SAW_15.2 SAW_15.3 SAW_15.4 SAW_15.6 SAW_15.7 SAW_15.8 SAW_15.9 SAW_16.1 SAW_16.2 SAW_16.3 SAW_16.4 SAW_16.6 SAW_16.7 SAW_16.8 SAW_16.9 X1.2 X1.3 X1.4 X1.5 X2.2 X2.3 X2.4 X2.5 X3.2 X3.3 X3.4 X3.5 X4.2 X4.3 X4.4 X4.5 X5.2 X5.3 X5.4 X5.5 X6.2 X6.3 X6.4 X6.5 X7.2 X7.3 X7.4 X7.5 X8.2 X8.3 X8.4 X8.5 X9.2 X9.3 X9.4 X9.5 X10.2 X10.3 X10.4 X10.5 X11.2 X11.3 X11.4 X11.5 X12.2 X12.3 X12.4 X12.5 X13.2 X13.3 X13.4 X13.5 X14.2 X14.3 X14.4 X14.5 X15.2 X15.3 X15.4 X15.5 X16.2 X16.3 X16.4 X16.5 X17.2 X17.3 X17.4 X17.5 X18.2 X18.3 X18.4 X18.5 X19.2 X19.3 X19.4 X19.5 X20.2 X20.3 X20.4 X20.5 X21.2 X21.3 X21.4 X21.5 X22.2 X22.3 X22.4 X22.5 X23.2 X23.3 X23.4 X23.5 X24.2 X24.3 X24.4 X24.5 X25.2 X25.3 X25.4 X25.5 X26.2 X26.3 X26.4 X26.5 X27.2 X27.3 X27.4 X27.5 X28.2 X28.3 X28.4 X28.5 X29.2 X29.3 X29.4 X29.5 X30.2 X30.3 X30.4 X30.5 X31.2 X31.3 X31.4 X31.5 X32.2 X32.3 X32.4 X32.5 X33.2 X33.3 X33.4 X33.5
LDO_1_5V: C2.1 C3.1 C54.2 C56.OUT L1.2 R2.1 TP_1.TP
LDO_2_5V: C6.1 C7.1 C59.2 C61.OUT L4.2 R6.1 TP_2.TP
LDO_3_5V: C10.1 C11.1 C63.2 C65.OUT L7.1 R9.1 TP_3.TP
LDO_4_5V: C15.1 C16.1 C67.2 C69.OUT L10.2 R12.1 TP_4.TP
LDO_5_5V: C19.1 C20.1 C71.2 C75.OUT L11.2 R16.1 TP_5.TP
LDO_6_5V: C23.1 C24.1 C77.2 C79.OUT L12.1 R22.1 TP_6.TP
LDO_7_5V: C27.1 C28.1 C81.2 C83.OUT L13.2 R25.1 TP_7.TP
LDO_8_5V: C31.1 C32.1 C85.2 C87.OUT L14.2 R28.1 TP_8.TP
LDO_9_5V: C35.1 C36.1 C89.2 C91.OUT L15.2 R31.1 TP_9.TP
LDO_10_5V: C40.1 C41.1 C93.2 C95.OUT L18.2 R34.1 TP_10.TP
LDO_11_5V: C44.1 C45.1 C97.2 C99.OUT L21.2 R37.1 TP_11.TP
LDO_12_5V: C48.1 C49.1 C101.2 C103.OUT L24.2 R40.1 TP_12.TP
LNA_1_IN: C1.2 LNA_1.3
LNA_1_OUT: C4.1 L1.1 LNA_1.1
LNA_2_IN: C5.2 LNA_2.3
LNA_2_OUT: C8.2 L4.1 LNA_2.1
LNA_3_IN: C9.2 LNA_3.3
LNA_3_OUT: C12.1 L7.2 LNA_3.1
LNA_4_IN: C14.2 LNA_4.3
LNA_4_OUT: C17.1 L10.1 LNA_4.1
LNA_5_IN: C18.2 LNA_5.3
LNA_5_OUT: C21.1 L11.1 LNA_5.1
LNA_6_IN: C22.2 LNA_6.3
LNA_6_OUT: C25.1 L12.2 LNA_6.1
LNA_7_IN: C26.2 LNA_7.3
LNA_7_OUT [GND]: C29.1 L13.1 LNA_7.1
LNA_8_IN: C30.2 LNA_8.3
LNA_8_OUT [GND]: C33.1 L14.1 LNA_8.1
LNA_9_IN: C34.2 LNA_9.3
LNA_9_OUT [GND]: C37.1 L15.1 LNA_9.1
LNA_10_IN: C39.2 L17.1 LNA_10.3
LNA_10_OUT: C42.1 L18.1 L19.1 LNA_10.1
LNA_11_IN: C43.2 L20.1 LNA_11.3
LNA_11_OUT: C46.1 L21.1 L22.1 LNA_11.1
LNA_12_IN: C47.2 L23.1 LNA_12.3
LNA_12_OUT: C50.1 L24.1 L25.1 LNA_12.1
N$12: C54.1 LDO_1.3 R2.2 R3.1
N$13: C53.1 LDO_1.6
N$14: C55.OUT LDO_1.7 LDO_1.8
N$15: C56.IN LDO_1.1 LDO_1.2
N$16: C59.1 LDO_2.3 R6.2 R7.1
N$17: C58.1 LDO_2.6
N$18: C60.OUT LDO_2.7 LDO_2.8
N$19: C61.IN LDO_2.1 LDO_2.2
N$20: C63.1 LDO_3.3 R9.2 R10.1
N$22: C62.1 LDO_3.6
N$24: C64.OUT LDO_3.7 LDO_3.8
N$25: C65.IN LDO_3.1 LDO_3.2
N$27: C67.1 LDO_4.3 R12.2 R14.1
N$28: C66.1 LDO_4.6
N$30: C68.OUT LDO_4.7 LDO_4.8
N$33: C69.IN LDO_4.1 LDO_4.2
N$34: C71.1 LDO_5.3 R16.2 R19.1
N$36: C70.1 LDO_5.6
N$38: C74.OUT LDO_5.7 LDO_5.8
N$39: C75.IN LDO_5.1 LDO_5.2
N$40: C81.1 LDO_7.3 R25.2 R26.1
N$41: C77.1 LDO_6.3 R22.2 R23.1
N$42: C76.1 LDO_6.6
N$43: C78.OUT LDO_6.7 LDO_6.8
N$45: C79.IN LDO_6.1 LDO_6.2
N$46: C80.1 LDO_7.6
N$47: C82.OUT LDO_7.7 LDO_7.8
N$48: C83.IN LDO_7.1 LDO_7.2
N$49: C85.1 LDO_8.3 R28.2 R29.1
N$50: C84.1 LDO_8.6
N$51: C86.OUT LDO_8.7 LDO_8.8
N$52: C87.IN LDO_8.1 LDO_8.2
N$53: C89.1 LDO_9.3 R31.2 R32.1
N$54: C88.1 LDO_9.6
N$56: C90.OUT LDO_9.7 LDO_9.8
N$57: C91.IN LDO_9.1 LDO_9.2
N$61: C93.1 LDO_10.3 R34.2 R35.1
N$62: C92.1 LDO_10.6
N$63: C94.OUT LDO_10.7 LDO_10.8
N$64: C95.IN LDO_10.1 LDO_10.2
N$66: C97.1 LDO_11.3 R37.2 R38.1
N$67: C96.1 LDO_11.6
N$68: C98.OUT LDO_11.7 LDO_11.8
N$69: C99.IN LDO_11.1 LDO_11.2
N$70: C101.1 LDO_12.3 R40.2 R41.1
N$71: C100.1 LDO_12.6
N$72: C102.OUT LDO_12.7 LDO_12.8
N$73: C103.IN LDO_12.1 LDO_12.2
N$169: C500.1 L31.2
N$178: IC58.30 R1.1 R4.2
N$180: IC58.8 TP10.TP
N$191: IC58.22 R206.2
N$193: IC58.26 R205.2
N$196: C459.IN IC58.34 IC58.35 IC58.36 IC58.37 IC58.38 IC58.41
N$213: LED1.A R201.1
PH: IC58.10 IC58.13 IC58.14 IC58.15 IC58.16 IC58.17 IC58.18 IC58.19 IC58.42 IC58.42A IC58.42B IC58.42C IC58.42D IC58.42E IC58.42F IC58.42G IC58.42H IC58.42J IC58.42K IC58.42L IC58.42M IC58.42N IC58.42P
PRE_OUT: IC1.3 X33.1
SAW+6_OUT: C22.1 SAW_6.6 X13.1
SAW_1_OUT: C1.1 SAW_1.8 X2.1
SAW_2_IN [GND]: C4.2 L2.2 SAW_2.2 X3.1
SAW_2_OUT: C5.1 L3.2 SAW_2.6 X4.1
SAW_3_IN: C8.1 L5.2 SAW_3.2 X5.1
SAW_3_OUT: C9.1 L6.2 SAW_3.6 X6.1
SAW_4_IN: C12.2 L8.2 SAW_4.2 X7.1
SAW_4_OUT: C13.1 L9.2 SAW_4.6
SAW_5_IN: C17.2 SAW_5.2 X10.1
SAW_5_OUT: C18.1 SAW_5.6 X11.1
SAW_6_IN: C21.2 SAW_6.2 X12.1
SAW_7_8_RF: SAW_7.6 SAW_8.2 X15.1
SAW_7_IN: C25.2 SAW_7.2 X14.1
SAW_9_IN: C29.2 SAW_9.2 X18.1
SAW_9_OUT: C30.1 SAW_9.5 X19.1
SAW_10_IN: C33.2 SAW_10.2 X20.1
SAW_10_OUT: C34.1 SAW_10.5 X21.1
SAW_11_12_RF: SAW_11.5 SAW_12.2 X23.1
SAW_11_IN: C37.2 SAW_11.2 X22.1
SAW_13_IN: C38.2 SAW_13.10
SAW_13_OUT: C39.1 SAW_13.5 X26.1
SAW_14_IN: C42.2 SAW_14.10 X27.1
SAW_14_OUT: C43.1 SAW_14.5 X28.1
SAW_15_IN: C46.2 SAW_15.10 X29.1
SAW_15_OUT: C47.1 SAW_15.5 X30.1
SAW_16_IN: C50.2 SAW_16.10 X31.1
SAW_16_OUT: C51.1 SAW_16.5

## Tracks (layer width: path | path; a pad name or v marks a point on that pad's centre or on a via)
1.25_RF_OUT
  Top 0.254: SAW_8.6 X16.1
  Top 0.429: IC1.7 146.05,95.76 145.03,94.74 X16.1
1.25M_RF_IN
  Top 0.254: X9.1 C14.1
2M_RF_IN
  Top 0.254: X1.1 16.42,64.77 SAW_1.1
2M_RF_OUT
  Top 0.254: X8.1 161.02,49.53 C13.2
  Top 0.429: IC1.9 157.23,93.22 154.43,90.42 154.43,83.31 166.24,71.5 X8.1
4M_RF_IN
  Top 0.254: X25.1 L16.1 | C38.1 15.98,12.48
  Top 0.406: L16.1 15.98,12.48
4M_RF_OUT
  Top 0.254: C51.2 154.69,14.28 154.94,14.02 L26.1 156.08,15.16 156.59,15.67 X32.1 163.02,15.75
  Top 0.429: IC1.10 160.9,84.98 178.56,67.31 178.56,25.4 168.91,15.75 163.02,15.75
70CM_RF_IN
  Top 0.254: X17.1 C26.1
70CM_RF_OUT
  Top 0.254: SAW_12.5 X24.1 | 159.77,97.03 IC1.6
  Top 0.429: X24.1 143.51,115.06 151.89,106.68 151.89,100.84 153.92,98.81 157.99,98.81 159.77,97.03
+5V3  (via drill 0.25, 1.27)
  Top 0.254: IC58.27 164.38,119.85 v165.1,119.13 | v165.1,113.54 v165.1,109.73 | LDO_10.5 56.73,31.41 v56.9,31.24 | v61.98,31.5 61.98,32.13 v62.74,32.89 | LDO_11.5 99.04,31 v99.31,30.73 | v105.41,29.97 105.41,31.77 v105.44,31.8 | LDO_12.5 140.57,29.86 v140.72,29.72 | v146.56,28.96 146.56,30.58 v146.53,30.61 | LDO_1.5 50.68,63.36 v50.8,63.25 | v56.64,62.48 56.64,63.96 v56.74,64.06 | LDO_2.5 93.15,63.06 v93.47,62.74 | v99.06,62.23 99.06,63.83 v99.03,63.86 | LDO_3.5 140.09,63.11 v140.21,62.99 | v144.78,62.48 144.91,62.48 v146.3,63.88 | LDO_4.5 32.19,100.14 v32.26,100.08 | v37.85,99.82 37.85,101.58 v37.87,101.6 | LDO_6.5 111.95,99.13 v112.01,99.06 | v118.11,98.81 118.11,100.51 v118.03,100.58 | LDO_7.5 33.74,129.84 v33.78,129.79 | v38.86,128.78 v38.86,130.68 | LDO_8.5 67.02,128.81 v67.31,128.52 | v73.41,128.52 73.41,130.43 v73.28,130.56 | LDO_9.5 102.51,128.89 v102.49,128.6 | v108.71,128.78 108.71,130.45 v108.76,130.5
  Top 0.356: LDO_5.5 72.35,99.63 v72.75,99.24 | v78.23,99.57 78.23,101.47 v78.84,102.08
  Bottom 0.254: v165.1,119.13 v165.1,113.54 | v56.9,31.24 61.72,31.24 v61.98,31.5 | v99.31,30.73 100.84,30.73 101.6,29.97 v105.41,29.97 | v140.72,29.72 141.73,29.72 142.49,28.96 v146.56,28.96 | v50.8,63.25 52.07,63.25 52.83,62.48 v56.64,62.48 | v93.47,62.74 94.56,62.74 95.12,62.18 99.01,62.18 v99.06,62.23 | v140.21,62.99 141.48,62.99 142.49,61.98 144.27,61.98 v144.78,62.48 | v32.26,100.08 33.98,100.08 34.24,99.82 v37.85,99.82 | v112.01,99.06 113.77,99.06 114.2,98.63 117.93,98.63 v118.11,98.81 | v33.78,129.79 34.29,129.79 35.33,128.75 38.84,128.75 v38.86,128.78 | v67.31,128.52 v73.41,128.52 | v102.49,128.6 102.67,128.6 103.2,128.8 v108.71,128.78
  Bottom 0.356: v72.75,99.24 77.9,99.24 v78.23,99.57
  other vias: 62.74,33.91 56.77,65.15 105.44,32.82 99.03,64.87 118.03,101.6 108.76,131.62 166.12,109.73 165.1,108.71 166.12,108.71 165.1,107.7 166.12,107.7 167.13,107.7 168.15,107.7 169.16,107.7 170.18,107.7 171.2,107.7 172.21,107.7 173.23,107.7 174.24,107.7 172.72,108.71 173.23,109.73 172.21,109.73 171.2,109.73 170.18,109.73 169.16,109.73 169.67,108.71 170.69,108.71 171.7,108.71 73.28,131.57 38.86,131.7 146.3,65.02 132.46,132.84 146.51,31.6 37.85,102.57
  pour Top (isolate 0.254): 164.59,110.36 175.26,110.36 175.26,107.06 164.59,107.06
  pour PWR: 0,0 0,137.67 182.88,137.67 182.88,0
  pour Top: 60.2,33.91 61.21,34.42 63.25,34.42 63.25,32.26 61.21,32.26 60.2,32.89
  pour Top: 54.23,65.15 55.24,65.66 57.28,65.66 57.28,63.5 55.24,63.5 54.23,64.14
  pour Top: 102.9,32.82 103.91,33.32 105.94,33.32 105.94,31.17 103.91,31.17 102.9,31.8
  pour Top: 143.99,31.62 145.01,32.13 147.04,32.13 147.04,29.97 145.01,29.97 143.99,30.61
  pour Top: 96.49,64.87 97.51,65.38 99.54,65.38 99.54,63.22 97.51,63.22 96.49,63.86
  pour Top: 143.71,64.95 144.73,65.46 146.76,65.46 146.76,63.3 144.73,63.3 143.71,63.93
  pour Top: 35.33,102.62 36.35,103.12 38.38,103.12 38.38,100.97 36.35,100.97 35.33,101.6
  pour Top: 76.3,102.08 77.32,102.59 79.35,102.59 79.35,100.43 77.32,100.43 76.3,101.07
  pour Top: 115.49,101.6 116.51,102.11 118.54,102.11 118.54,99.95 116.51,99.95 115.49,100.58
  pour Top (isolate 0.254, rank 2): 106.22,131.62 107.24,132.13 109.27,132.13 109.27,129.97 107.24,129.97 106.22,130.61
  pour Top (isolate 0.254, rank 2): 70.74,131.57 71.75,132.08 73.79,132.08 73.79,129.92 71.75,129.92 70.74,130.56
  pour Top (isolate 0.254, rank 2): 36.32,131.7 37.34,132.21 39.37,132.21 39.37,130.05 37.34,130.05 36.32,130.68
+13.8V_SW_FIL  (via drill 0.25)
  Top 0.254: IC58.3 175.69,118.25 C491.1 | R4.1 163.28,113.07 v163.58,112.78 | v170.69,113.79 171.7,113.79
  Bottom 0.254: v163.58,112.78 169.67,112.78 v170.69,113.79
  pour Top (isolate 0.254): 144.27,127 147.83,127 148.84,125.98 158.5,125.98 159,126.49 159,132.08 159.51,132.59 162.05,132.59 166.12,128.52 169.16,128.52 169.67,128.02 169.67,125.98 170.81,125.98 171.32,124.33 175.77,124.46 175.77,129.54 175.26,130.05 168.66,130.05 162.56,136.14 155.96,136.14 155.45,135.64 155.45,131.06 153.92,130.05 150.88,130.05 149.35,129.03 144.27,129.03
  pour Top (isolate 0.254, rank 2): 170.05,116.2 170.05,111.76 175.13,111.89 175.13,114.94 176.28,116.08 176.28,125.22 172.34,125.22 172.34,117.86 173.35,117.86 173.48,117.73 173.48,117.09 173.35,116.97 172.59,116.97 172.59,116.2
+13.8V_TPS
  Top 1.016: J1.2 141.22,129.79 140.72,129.29 L31.1
FLEXR
  pour Top (rank 2): 4.14,31.79 4.67,31.79 5.06,31.78 5.16,31.75 5.49,31.66 5.91,31.48 6.43,31.16 6.83,30.83 7.21,30.58 7.58,30.37 8.15,30.14 8.75,29.98 9.26,29.93 30.25,29.93 30.3,29.94 30.33,29.98 30.3,30.02 30.19,30.09 30.1,30.21 30.04,30.38 29.75,31.99 30.12,31.98 30.33,30.52 30.38,30.45 30.46,30.4 30.52,30.39 31.21,32 31.58,31.98 30.7,29.94 41.1,29.95 41.09,29.78 30.59,29.78 30.49,29.6 30.33,29.44 30.12,29.34 29.84,29.29 29.65,29.3 29.65,29.62 29.81,29.62 30.06,29.68 30.18,29.78 9.17,29.79 8.64,29.8 8.35,29.83 7.94,29.89 7.6,29.99 7.23,30.14 7.1,30.19 6.85,30.31 6.54,30.52 6.43,30.59 6.07,30.89 5.59,31.2 5.22,31.41 4.81,31.55 4.57,31.63 4.15,31.66 4.11,31.69 4.14,31.78
  pour Top: 4.74,32 4.7,32.04 4.7,32.09 4.74,32.14 4.82,32.14 5.4,32.13 5.53,32.12 5.75,32.09 6.06,32 6.32,31.88 6.65,31.71 7.05,31.46 7.42,31.18 7.68,30.99 7.89,30.84 8.27,30.65 8.69,30.48 8.99,30.4 9.22,30.34 9.54,30.3 9.76,30.28 9.84,30.25 9.87,30.21 9.87,30.18 9.82,30.14 9.72,30.13 9.25,30.14 8.76,30.19 8.29,30.29 7.77,30.48 7.37,30.69 6.98,30.96 6.55,31.29 6.27,31.49 5.92,31.68 5.59,31.83 5.16,31.95 4.86,32 4.8,32
  pour Top: 5.38,32.33 5.34,32.35 5.32,32.38 5.33,32.41 5.36,32.45 6.21,32.45 6.35,32.43 6.72,32.31 7.04,32.18 7.36,31.98 7.67,31.78 8.08,31.46 8.36,31.26 8.71,31.07 8.93,30.98 9.18,30.86 9.48,30.77 9.75,30.68 10.22,30.61 10.44,30.6 10.46,30.82 10.21,30.82 9.9,30.88 9.46,30.98 9.13,31.09 8.58,31.36 8.28,31.54 7.96,31.79 7.75,31.98 7.44,32.18 7.16,32.33 6.71,32.53 6.39,32.63 6.22,32.66 6,32.66 5.94,32.69 5.92,32.72 5.92,32.77 5.95,32.79 6.76,32.79 7.02,32.74 7.44,32.56 7.8,32.41 8.16,32.16 8.55,31.88 8.9,31.6 9.47,31.3 9.94,31.13 10.32,31.03 10.5,31 10.8,32.72 12.44,32.71 12.39,32.42 11.09,32.42 10.95,31.65 11.89,31.64 11.86,31.37 10.9,31.36 10.85,31.01 10.86,30.96 10.91,30.96 10.99,30.95 11.03,30.92 11,30.85 10.97,30.83 10.87,30.8 10.8,30.77 10.68,30.07 10.33,30.09 10.4,30.45 10.13,30.46 9.73,30.48 9.32,30.55 8.9,30.64 8.46,30.8 8.1,30.97 7.7,31.22 7.41,31.43 7.15,31.63 6.93,31.79 6.69,31.92 6.47,32.04 6.17,32.17 5.89,32.27 5.61,32.32
  pour Top: 12.92,32.79 12.9,32.79 12.47,30.51 12.47,30.42 12.48,30.33 12.53,30.21 12.59,30.16 12.67,30.11 12.78,30.07 12.91,30.05 13.02,30.04 13.06,30.26 12.94,30.28 12.87,30.31 12.83,30.36 12.8,30.44 12.79,30.52 12.81,30.68 13.23,32.8
  pour Top: 14,31.76 14.15,31.88 14.33,31.95 14.55,32 14.74,32.01 14.92,31.99 15.07,31.93 15.18,31.85 15.28,31.71 15.3,31.57 15.29,31.43 15.25,31.28 15.17,31.17 15.06,31.08 14.95,31.02 14.71,30.93 14.53,30.9 14.34,30.9 14.15,30.92 14.01,30.95 13.98,30.99 14.05,31.19 14.17,31.16 14.41,31.13 14.63,31.17 14.82,31.24 14.95,31.34 15.02,31.46 15.02,31.55 14.97,31.67 14.9,31.72 14.8,31.76 14.73,31.77 14.64,31.76 14.53,31.74 14.45,31.72 14.36,31.69 14.29,31.62 14.15,31.49 14.08,31.4 14.01,31.3 13.91,31.01 13.92,30.92 13.91,30.82 13.92,30.72 13.96,30.59 13.99,30.51 14.05,30.43 14.14,30.37 14.24,30.31 14.34,30.29 14.46,30.28 14.6,30.29 14.68,30.31 14.8,30.38 14.86,30.41 14.82,30.14 14.73,30.11 14.6,30.07 14.47,30.05 14.31,30.04 14.17,30.05 14.07,30.07 13.93,30.12 13.86,30.17 13.77,30.25 13.7,30.37 13.64,30.52 13.6,30.7 13.6,30.84 13.61,31.01 13.64,31.19 13.68,31.33 13.76,31.5 13.86,31.62 13.91,31.69
  pour Top: 15.72,31.99 16.08,31.99 16.38,31.36 16.4,31.34 16.43,31.38 16.91,31.98 17.32,31.98 16.57,31.06 16.59,31.01 16.6,31 17.09,30.08 16.68,30.07 16.34,30.75 15.79,30.08 15.42,30.07 16.2,31.06 15.75,31.92
  pour Top: 17.42,30.08 17.89,32.7 18.46,32.72 18.67,32.71 18.83,32.7 19,32.66 19.15,32.58 19.25,32.47 19.35,32.35 19.38,32.19 19.38,32.1 19.36,31.97 19.32,31.82 19.25,31.69 19.17,31.59 19.06,31.47 18.97,31.41 18.88,31.35 18.77,31.31 18.68,31.28 19.18,30.07 18.81,30.07 18.4,31.22 18.03,31.22 18.06,31.5 18.48,31.48 18.66,31.55 18.85,31.62 18.99,31.77 19.03,31.91 19.04,32.09 19.01,32.21 18.92,32.33 18.83,32.38 18.69,32.42 18.58,32.44 18.47,32.45 18.35,32.44 18.24,32.43 18.19,32.4 18.15,32.37 17.76,30.07 17.59,30.07
  pour Top: 19.59,30.77 19.62,30.91 19.63,31.05 19.66,31.18 19.77,31.42 19.88,31.58 20.02,31.74 20.13,31.85 20.33,31.93 20.5,31.99 20.66,32.02 20.86,32.01 21.04,31.98 21.19,31.95 21.34,31.88 21.12,30.78 21.09,30.65 21.09,30.54 21.11,30.38 21.14,30.21 21.19,30.07 20.85,30.07 20.83,30.21 20.82,30.8 21.02,31.69 20.96,31.72 20.88,31.75 20.78,31.78 20.69,31.78 20.64,31.78 20.57,31.78 20.44,31.73 20.34,31.67 20.25,31.6 20.14,31.48 20.08,31.38 20.03,31.28 19.96,31.1 19.95,31 19.93,30.88 19.91,30.73 19.91,30.6 19.94,30.47 19.99,30.4 20.05,30.34 20.15,30.3 20.28,30.27 20.39,30.3 20.52,30.36 20.59,30.43 20.66,30.51 20.72,30.6 20.76,30.73 20.75,30.21 20.61,30.12 20.49,30.07 20.36,30.03 20.11,30.04 19.96,30.06 19.84,30.11 19.74,30.21 19.68,30.28 19.64,30.39 19.62,30.51 19.6,30.63
  pour Top: 21.63,31.14 21.65,31.27 21.69,31.38 21.79,31.53 21.89,31.65 21.99,31.76 22.12,31.85 22.29,31.93 22.45,31.99 22.66,32.01 22.8,32 22.9,31.95 22.97,31.92 23.05,31.86 23.11,31.79 23.29,32.79 23.58,32.78 23.1,30.07 22.8,30.07 22.83,30.21 22.81,30.26 22.76,30.22 22.67,30.15 22.57,30.11 22.36,30.05 22.14,30.04 21.96,30.08 21.84,30.14 21.76,30.23 21.67,30.35 21.62,30.52 21.6,30.65 21.59,30.79 21.61,30.99 21.95,30.99 21.93,30.84 21.93,30.7 21.96,30.56 22.02,30.45 22.1,30.37 22.21,30.3 22.33,30.28 22.43,30.27 22.54,30.31 22.64,30.38 22.71,30.45 22.81,30.58 22.89,30.73 22.93,30.84 22.98,31.11 23.03,31.39 23.03,31.51 22.99,31.59 22.9,31.68 22.79,31.74 22.65,31.76 22.54,31.75 22.45,31.72 22.33,31.66 22.22,31.57 22.14,31.46 22.06,31.35 22,31.24 21.96,31.09 21.95,31.04 21.61,31.04
  pour Top: 23.81,31.74 24.1,31.74 23.79,30.07 24.1,30.07 24.44,31.98 23.87,31.98 23.84,31.88
  pour Top: 24.16,32.4 24.12,32.44 24.11,32.5 24.12,32.58 24.15,32.65 24.22,32.7 24.32,32.73 24.42,32.71 24.47,32.66 24.52,32.59 24.52,32.49 24.49,32.42 24.42,32.35 24.33,32.33 24.27,32.33
  pour Top: 25.19,31.76 25.26,31.81 25.36,31.88 25.48,31.95 25.64,31.99 25.79,32.02 25.96,32.02 26.09,32 26.23,31.96 26.37,31.88 26.46,31.79 26.54,31.67 26.57,31.53 26.59,31.4 26.59,31.24 26.57,31.09 26.55,30.92 26.5,30.75 26.43,30.61 26.35,30.45 26.22,30.33 26.09,30.21 25.95,30.11 25.78,30.06 25.62,30.04 25.44,30.04 25.3,30.05 25.13,30.11 25.04,30.18 24.93,30.31 24.85,30.48 24.83,30.63 24.83,30.93 24.85,31.13 24.94,31.38 25.07,31.62 25.43,31.58 25.35,31.47 25.27,31.34 25.2,31.17 25.17,31.04 25.13,30.85 25.15,30.63 25.18,30.49 25.26,30.38 25.35,30.32 25.47,30.28 25.62,30.27 25.77,30.31 25.9,30.38 26.02,30.48 26.09,30.6 26.19,30.85 26.25,31.1 26.26,31.31 26.24,31.5 26.16,31.64 26.04,31.72 25.92,31.76 25.74,31.77 25.58,31.73 25.51,31.67 25.48,31.63 25.09,31.65
  pour Top: 27.97,30.16 28.07,30.47 28.16,30.42 28.26,30.37 28.36,30.33 28.51,30.3 28.63,30.3 28.78,30.31 28.91,30.37 29,30.45 29.06,30.54 29.09,30.67 29.11,30.79 29.08,30.89 29.01,30.99 28.94,31.08 28.83,31.18 28.7,31.27 28.51,31.43 28.42,31.51 28.31,31.62 28.24,31.76 28.21,31.88 28.21,32.05 28.21,32.16 28.24,32.28 28.3,32.42 28.4,32.52 28.54,32.63 28.68,32.7 28.83,32.74 29.03,32.75 29.24,32.74 29.45,32.72 29.54,32.68 29.41,32.35 29.32,32.41 29.19,32.45 29.04,32.47 28.91,32.47 28.78,32.44 28.68,32.38 28.61,32.29 28.55,32.2 28.54,32.05 28.54,31.92 28.61,31.83 28.94,31.5 29.06,31.43 29.14,31.34 29.22,31.27 29.29,31.18 29.36,31.06 29.4,30.94 29.41,30.78 29.39,30.6 29.36,30.45 29.25,30.28 29.12,30.18 29,30.11 28.8,30.05 28.56,30.04 28.35,30.04 28.19,30.08 28.07,30.12
  pour Top: 32.92,31.89 32.73,31.96 32.52,32 32.41,32 32.3,32.01 32.21,31.98 32.1,31.95 32.01,31.92 31.93,31.87 31.86,31.8 31.79,31.71 31.74,31.6 31.72,31.4 31.74,31.29 31.79,31.2 31.87,31.13 32.01,31.03 32.25,30.91 32.38,30.82 32.44,30.74 32.47,30.65 32.47,30.57 32.44,30.49 32.39,30.4 32.28,30.33 32.18,30.3 32.03,30.28 31.91,30.31 31.8,30.35 31.65,30.47 31.49,30.19 31.57,30.14 31.69,30.08 31.82,30.05 31.95,30.05 32.14,30.05 32.3,30.08 32.45,30.13 32.55,30.19 32.69,30.33 32.73,30.4 32.79,30.58 32.79,30.72 32.76,30.84 32.72,30.93 32.64,31.01 32.5,31.1 32.37,31.15 32.25,31.24 32.14,31.31 32.07,31.4 32.05,31.49 32.07,31.58 32.12,31.65 32.21,31.72 32.32,31.76 32.43,31.77 32.54,31.74 32.61,31.71 32.78,31.62
  pour Top: 33.38,31.99 33.61,31.99 33.7,32.4 34.06,32.53 33.92,31.97 34.46,31.99 34.41,31.77 33.85,31.75 33.83,31.55 33.75,31.2 33.65,30.72 33.63,30.61 33.63,30.54 33.64,30.47 33.69,30.4 33.74,30.34 33.82,30.31 33.92,30.29 34,30.3 34.11,30.32 34.2,30.36 34.2,30.1 34.13,30.07 34,30.04 33.85,30.04 33.63,30.04 33.54,30.07 33.46,30.11 33.4,30.19 33.36,30.28 33.33,30.37 33.32,30.49 33.34,30.67 33.36,30.8 33.56,31.75 33.33,31.76 33.36,31.91
  pour Top: 34.74,31.02 34.76,31.11 34.8,31.25 34.86,31.38 34.93,31.54 35.05,31.69 35.17,31.8 35.32,31.89 35.45,31.95 35.6,32 35.76,32.02 35.91,32.01 36.09,32 36.23,31.95 36.32,31.89 36.39,31.78 36.44,31.64 36.45,31.49 36.44,31.38 36.39,31.27 36.33,31.18 36.25,31.1 36.09,31.01 35.94,30.94 35.77,30.91 35.64,30.89 35.44,30.89 35.31,30.91 35.2,30.94 35.13,30.98 35.19,31.2 35.35,31.17 35.53,31.15 35.7,31.15 35.83,31.18 35.98,31.25 36.08,31.34 36.13,31.41 36.14,31.53 36.12,31.65 36.07,31.7 36,31.72 35.93,31.74 35.83,31.76 35.72,31.75 35.64,31.73 35.55,31.7 35.45,31.65 35.39,31.6 35.32,31.52 35.24,31.43 35.19,31.34 35.17,31.27 35.06,30.94 35.06,30.71 35.08,30.61 35.12,30.52 35.2,30.44 35.27,30.38 35.34,30.33 35.43,30.3 35.53,30.29 35.69,30.29 35.8,30.31 35.88,30.35 36,30.41 35.98,30.12 35.83,30.08 35.74,30.06 35.6,30.05 35.4,30.04 35.27,30.05 35.15,30.09 35.03,30.14 34.92,30.21 34.87,30.29 34.83,30.37 34.79,30.51 34.76,30.65 34.73,30.8 34.73,30.9
  pour Top: 36.68,30.08 36.94,31.53 36.94,31.57 36.94,31.67 36.93,31.79 36.92,31.92 36.91,31.96 37.21,32.02 37.23,31.91 37.24,31.83 37.25,31.77 37.3,31.84 37.37,31.89 37.47,31.93 37.61,31.98 37.72,32 37.83,32.02 37.99,32.01 38.12,31.97 38.22,31.92 38.3,31.85 38.39,31.75 38.48,31.84 38.61,31.92 38.73,31.97 38.84,32 39.02,32.02 39.15,32.01 39.3,31.95 39.39,31.88 39.45,31.79 39.5,31.69 39.5,31.53 39.5,31.46 39.26,30.08 38.94,30.08 39.16,31.22 39.16,31.42 39.15,31.52 39.12,31.6 39.08,31.67 39.02,31.72 38.95,31.74 38.87,31.76 38.77,31.76 38.72,31.75 38.65,31.72 38.56,31.69 38.51,31.65 38.44,31.59 38.4,31.54 38.37,31.48 38.13,30.07 37.8,30.07 38.04,31.36 38.05,31.44 38.05,31.52 38.02,31.6 37.99,31.67 37.94,31.71 37.79,31.75 37.73,31.75 37.65,31.74 37.57,31.72 37.5,31.7 37.44,31.67 37.37,31.62 37.31,31.57 37.27,31.51 37.24,31.45 37,30.07
  pour Top: 41.12,31.88 40.98,31.61 40.93,31.66 40.88,31.7 40.79,31.74 40.7,31.76 40.62,31.76 40.53,31.77 40.47,31.75 40.39,31.71 40.34,31.66 40.29,31.61 40.27,31.53 40.27,31.46 40.3,31.38 40.34,31.32 40.39,31.28 40.59,31.15 40.76,31.06 40.86,30.99 40.93,30.9 40.97,30.77 40.98,30.68 40.98,30.58 40.96,30.47 40.91,30.37 40.86,30.29 40.78,30.21 40.67,30.14 40.58,30.09 40.46,30.06 40.33,30.04 40.11,30.04 40.01,30.05 39.92,30.09 39.83,30.12 39.69,30.19 39.85,30.45 39.92,30.4 40.03,30.33 40.16,30.29 40.35,30.27 40.46,30.31 40.55,30.37 40.61,30.44 40.67,30.54 40.67,30.68 40.63,30.77 40.54,30.85 40.44,30.91 40.13,31.1 40.01,31.22 39.96,31.31 39.94,31.4 39.95,31.53 39.97,31.66 40.04,31.75 40.13,31.84 40.23,31.92 40.35,31.97 40.51,32.02 40.61,32.04 40.71,32.03 40.84,32 40.96,31.96
FLEXRADIO
  Top 0.102: 41.48,32.02 41.48,32.56 41.55,32.56 41.64,32.56 41.69,32.54 41.73,32.5 41.74,32.46 41.75,32.41 41.72,32.37 41.7,32.34 41.66,32.31 41.52,32.31
GND  (via drill 0.25, 1.27)
  Top 0.254: LDO_7.4 30.37,129.84 LDO_7.P5 | C82.GND3 35.56,130.32 C82.GND7 | C82.GND6 35.26,132.27 C82.GND2 | C83.GND8 27.22,130.24 C83.GND3 | C83.GND5 27.22,132.39 C83.GND2 | C87.GND6 60.94,132.62 C87.GND2 | C87.GND7 60.94,130.47 C87.GND3 | LDO_8.4 64.68,129.81 LDO_8.P5 | C86.GND3 69.98,130.43 70.1,130.56 70.1,130.09 C86.GND8 | C86.GND5 70.28,132.16 C86.GND2 | C91.GND7 96.32,130.62 C91.GND3 | C91.GND6 96.32,132.77 C91.GND2 | LDO_9.4 100.17,129.76 LDO_9.P5 | C90.GND5 105.79,132.19 C90.GND2 | C90.GND8 105.79,130.04 C90.GND3 | C69.GND8 25.19,100.3 C69.GND3 | C69.GND5 25.19,102.45 C69.GND2 | LDO_4.4 28.84,100.14 LDO_4.P5 | C68.GND5 34.9,103.18 C68.GND2 | C68.GND8 34.9,101.03 C68.GND3 | C75.GND6 65.74,102.19 C75.GND2 | C75.GND7 65.74,100.04 C75.GND3 | LDO_5.4 69.23,99.63 LDO_5.P5 | C74.GND8 75.86,100.5 C74.GND3 | C74.GND5 75.86,102.65 C74.GND2 | C79.GND7 103.84,99.79 C79.GND3 | C79.GND6 103.84,101.94 C79.GND2 | LDO_6.4 108.09,99.13 LDO_6.P5 | C78.GND5 115.06,102.17 C78.GND2 | C78.GND8 115.06,100.02 C78.GND3 | C56.GND6 42.85,65.67 C56.GND2 | C56.GND7 42.85,63.52 C56.GND3 | LDO_1.4 47.36,63.36 LDO_1.P5 | C55.GND6 53.17,65.72 C55.GND2 | C55.GND7 53.17,63.57 C55.GND3 | C61.GND7 86.03,63.72 C61.GND3 | C61.GND6 86.03,65.87 C61.GND2 | LDO_2.4 89.78,63.06 LDO_2.P5 | C60.GND8 96.06,63.29 C60.GND3 | C60.GND5 96.06,65.44 C60.GND2 | C65.GND5 132.86,66.63 C65.GND2 | C65.GND8 132.86,64.48 C65.GND3 | LDO_3.4 136.46,63.11 LDO_3.P5 | C64.GND5 143.28,65.52 C64.GND2 | C64.GND8 143.28,63.37 C64.GND3 | C95.GND6 49.23,33.77 C95.GND2 | C95.GND7 49.23,31.61 C95.GND3 | LDO_10.4 53.43,31.41 LDO_10.P5 | C94.GND7 59.16,32.3 C94.GND3 | C94.GND6 59.16,34.45 C94.GND2
  Top 0.254: C99.GND5 92.58,33.77 C99.GND2 | C99.GND8 92.58,31.61 C99.GND3 | LDO_11.4 95.62,31 LDO_11.P5 | C98.GND5 102.48,33.38 C98.GND2 | C98.GND8 102.48,31.23 C98.GND3 | C103.GND8 132.79,30.09 C103.GND3 | C103.GND5 132.79,32.24 C103.GND2 | LDO_12.4 136.87,29.86 LDO_12.P5 | C102.GND5 143.56,32.22 C102.GND2 | C102.GND8 143.56,30.07 C102.GND3 | C459.GND2 C459.GND3 | C459.GND4 C459.GND1